# Altium PCB FIT_PM_Dual_Range_AFE.PcbDoc (part 1 of 17)
Units mm, origin at the board's own origin, x right, y up, seen from the top; angles counter-clockwise.
Board outline 259 x 114 mm, 8 copper layers (Top Layer, Mid-Layer 1, Mid-Layer 2, Layer 1, Layer 2, Mid-Layer 3, Mid-Layer 4, Bottom Layer), stack 1.616 mm thick; 963 components, 806 nets, 4757 pads, 2208 vias.
Unrouted connection lines stored in the file: 682.
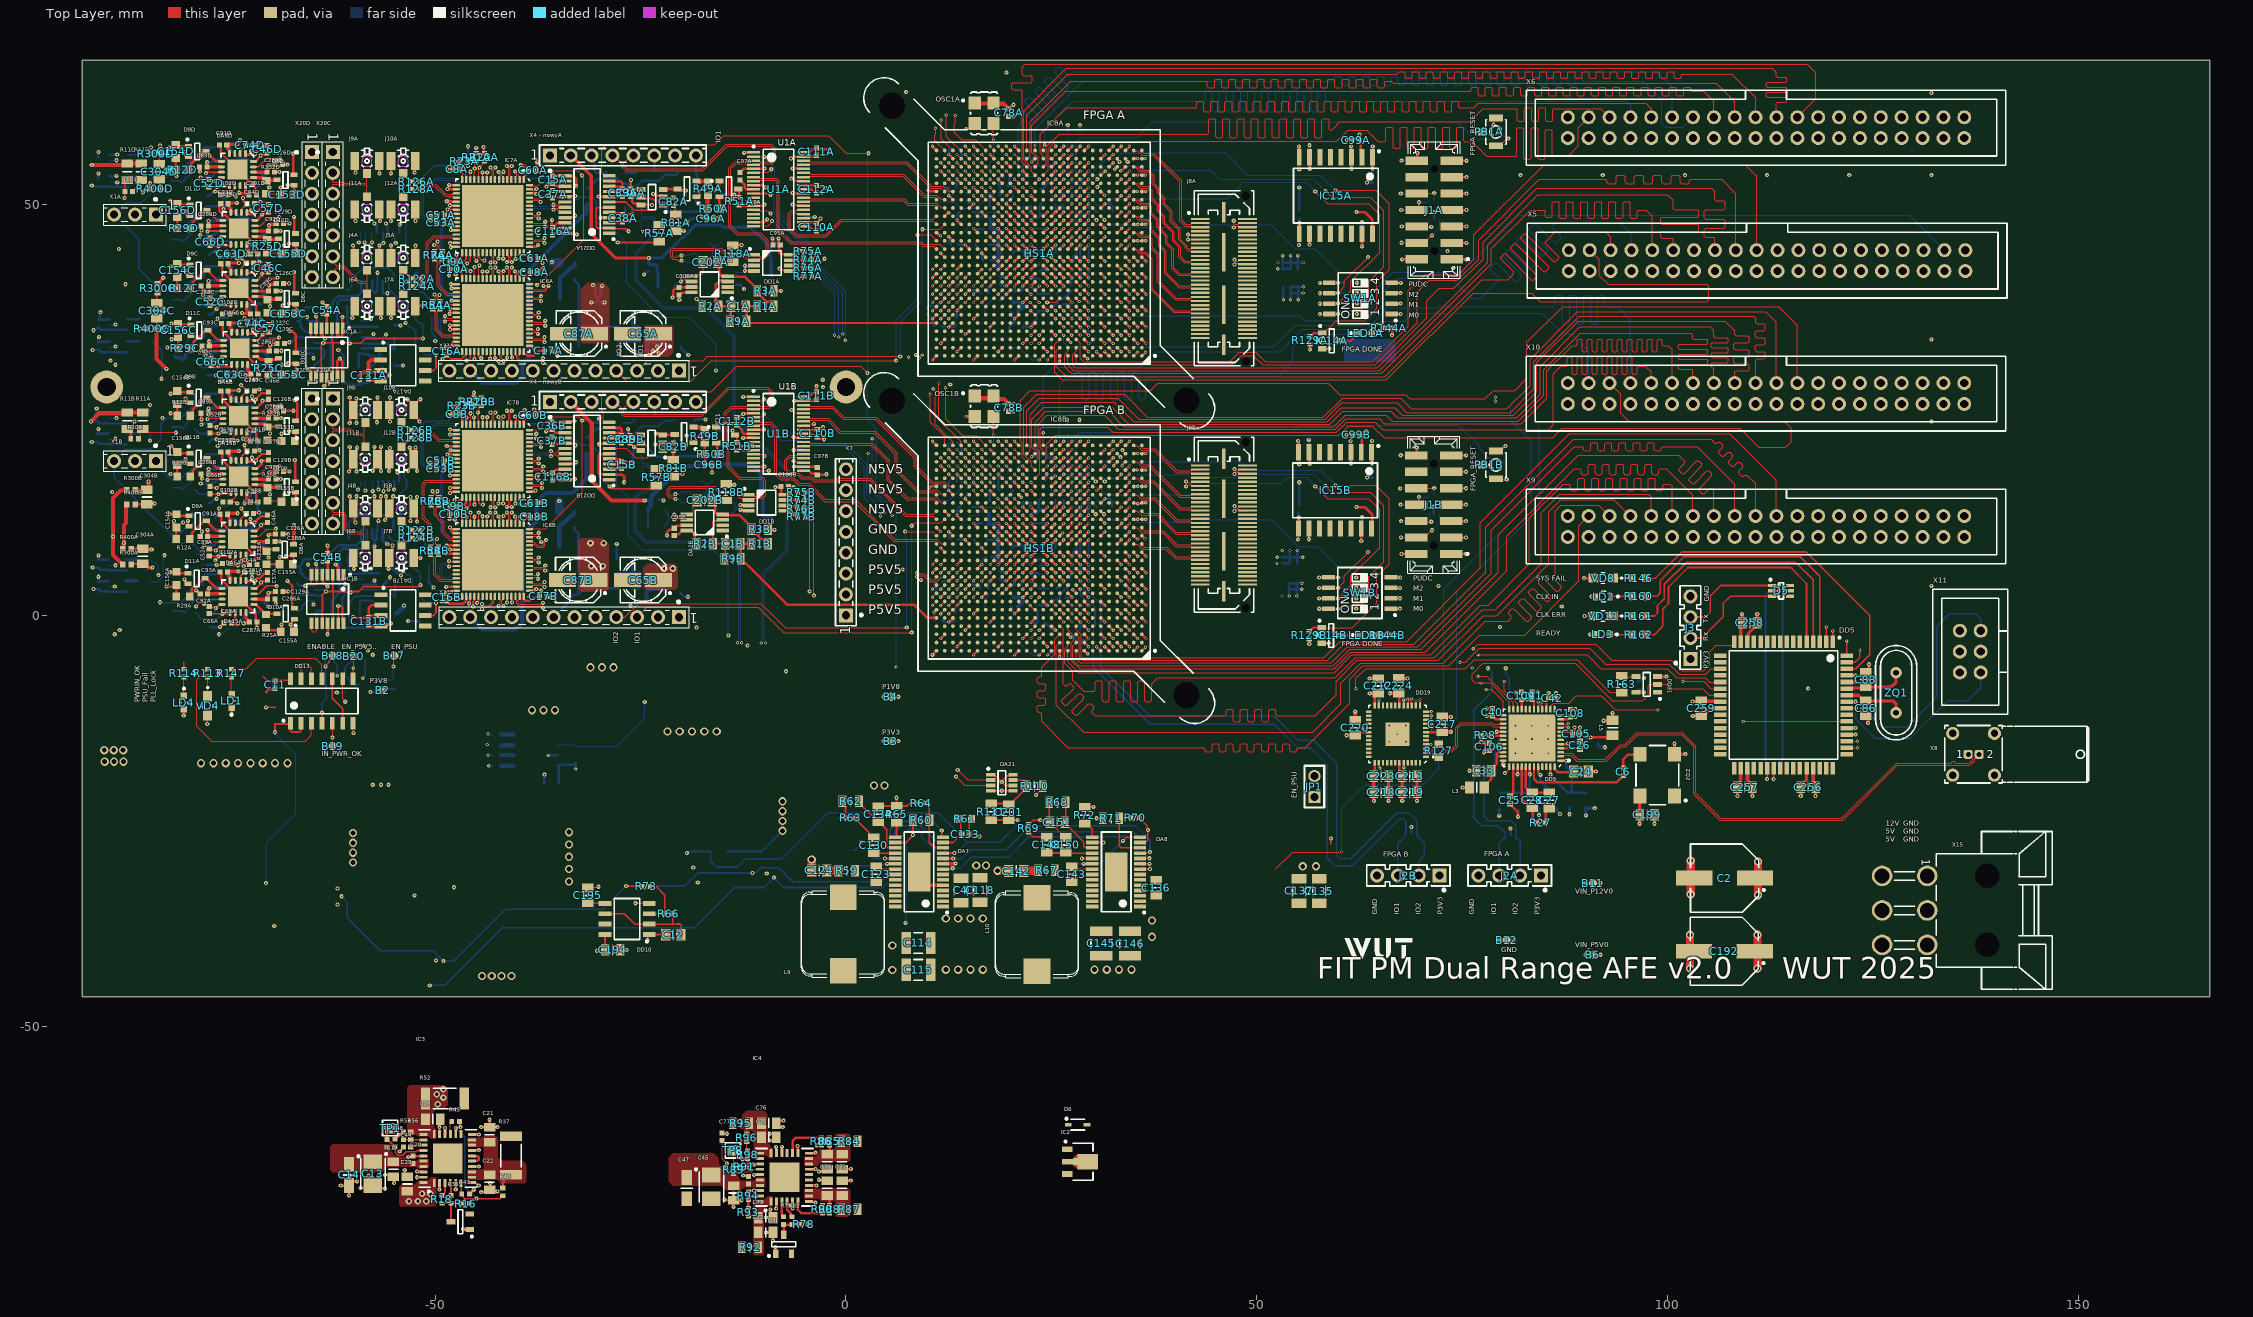
[diagram p0: Top Layer view]
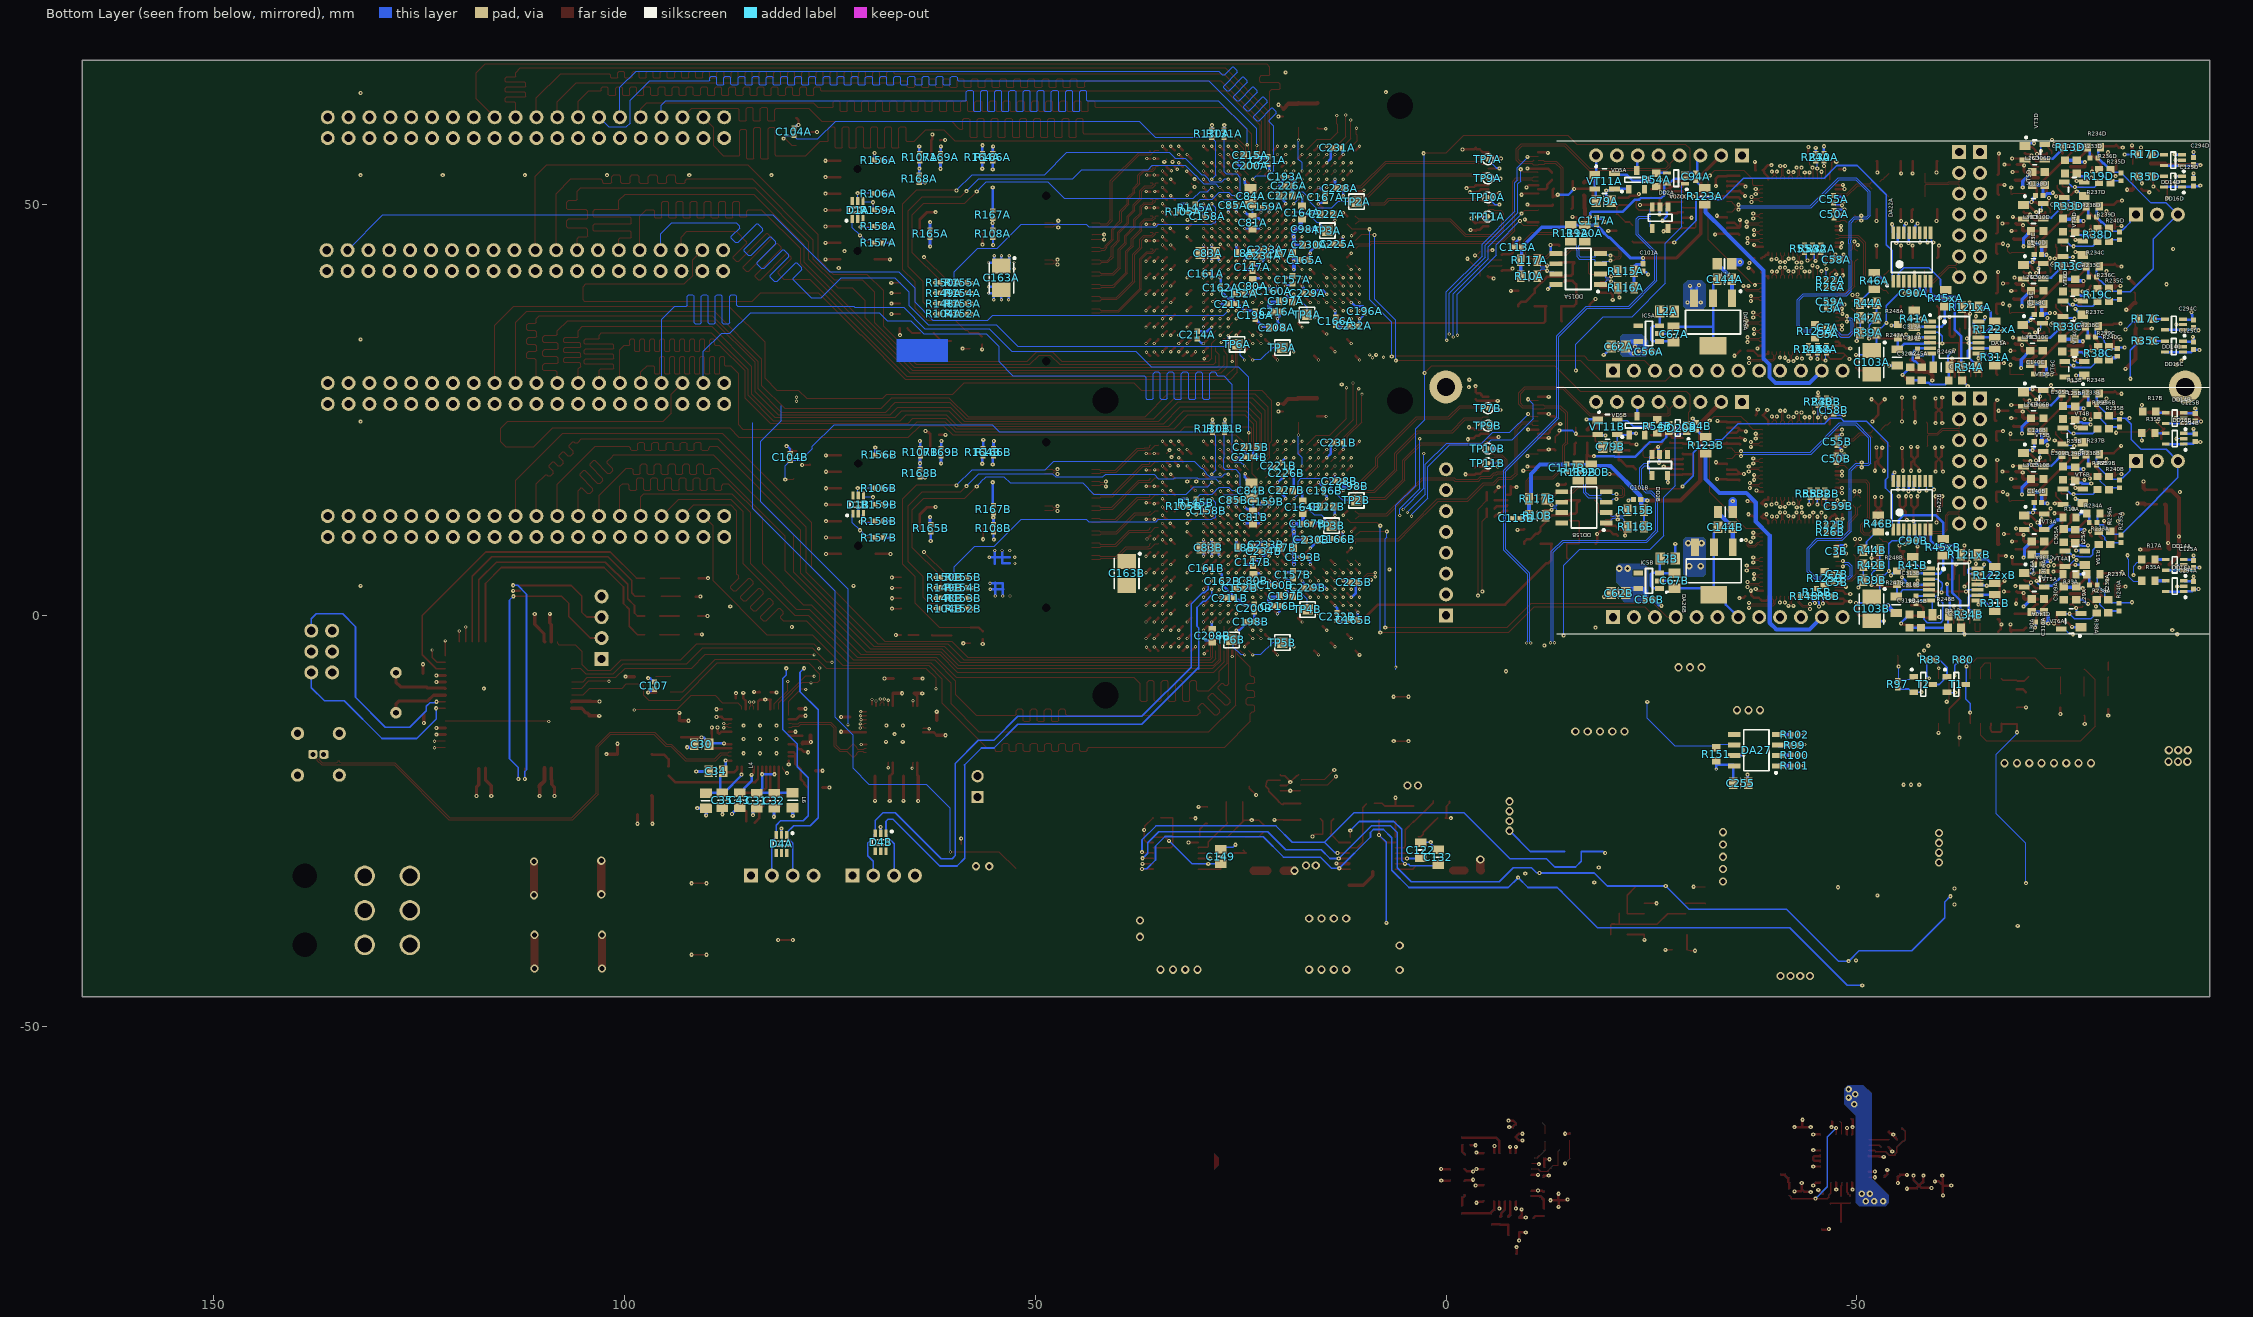
[diagram p1: Bottom Layer view, seen from below]
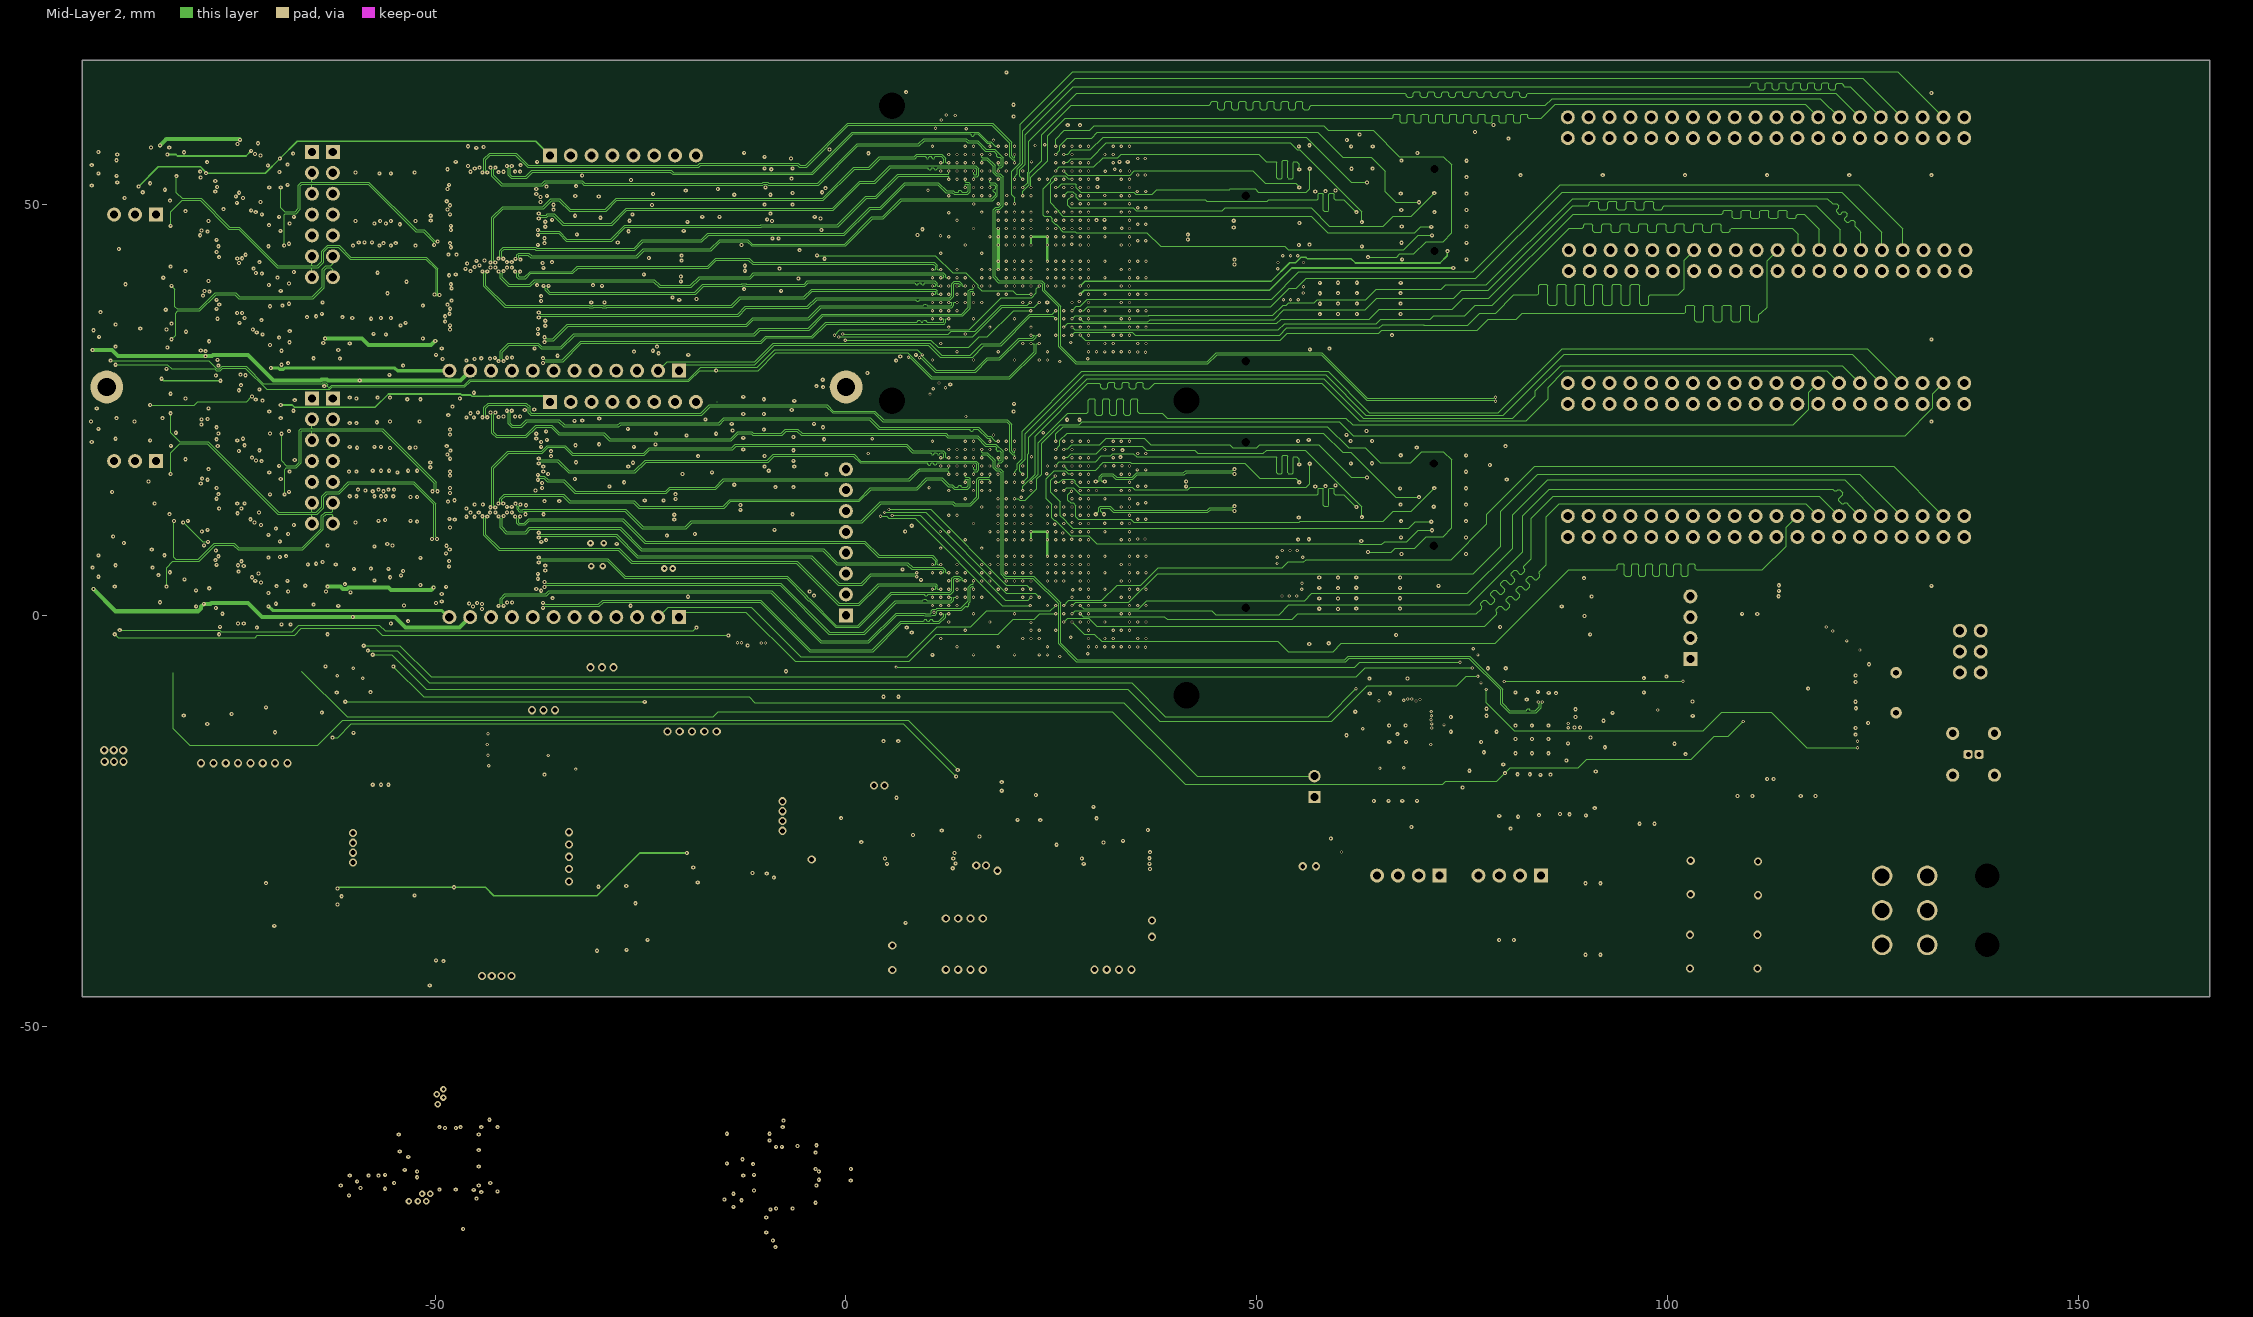
[diagram p2: Mid-Layer 2]
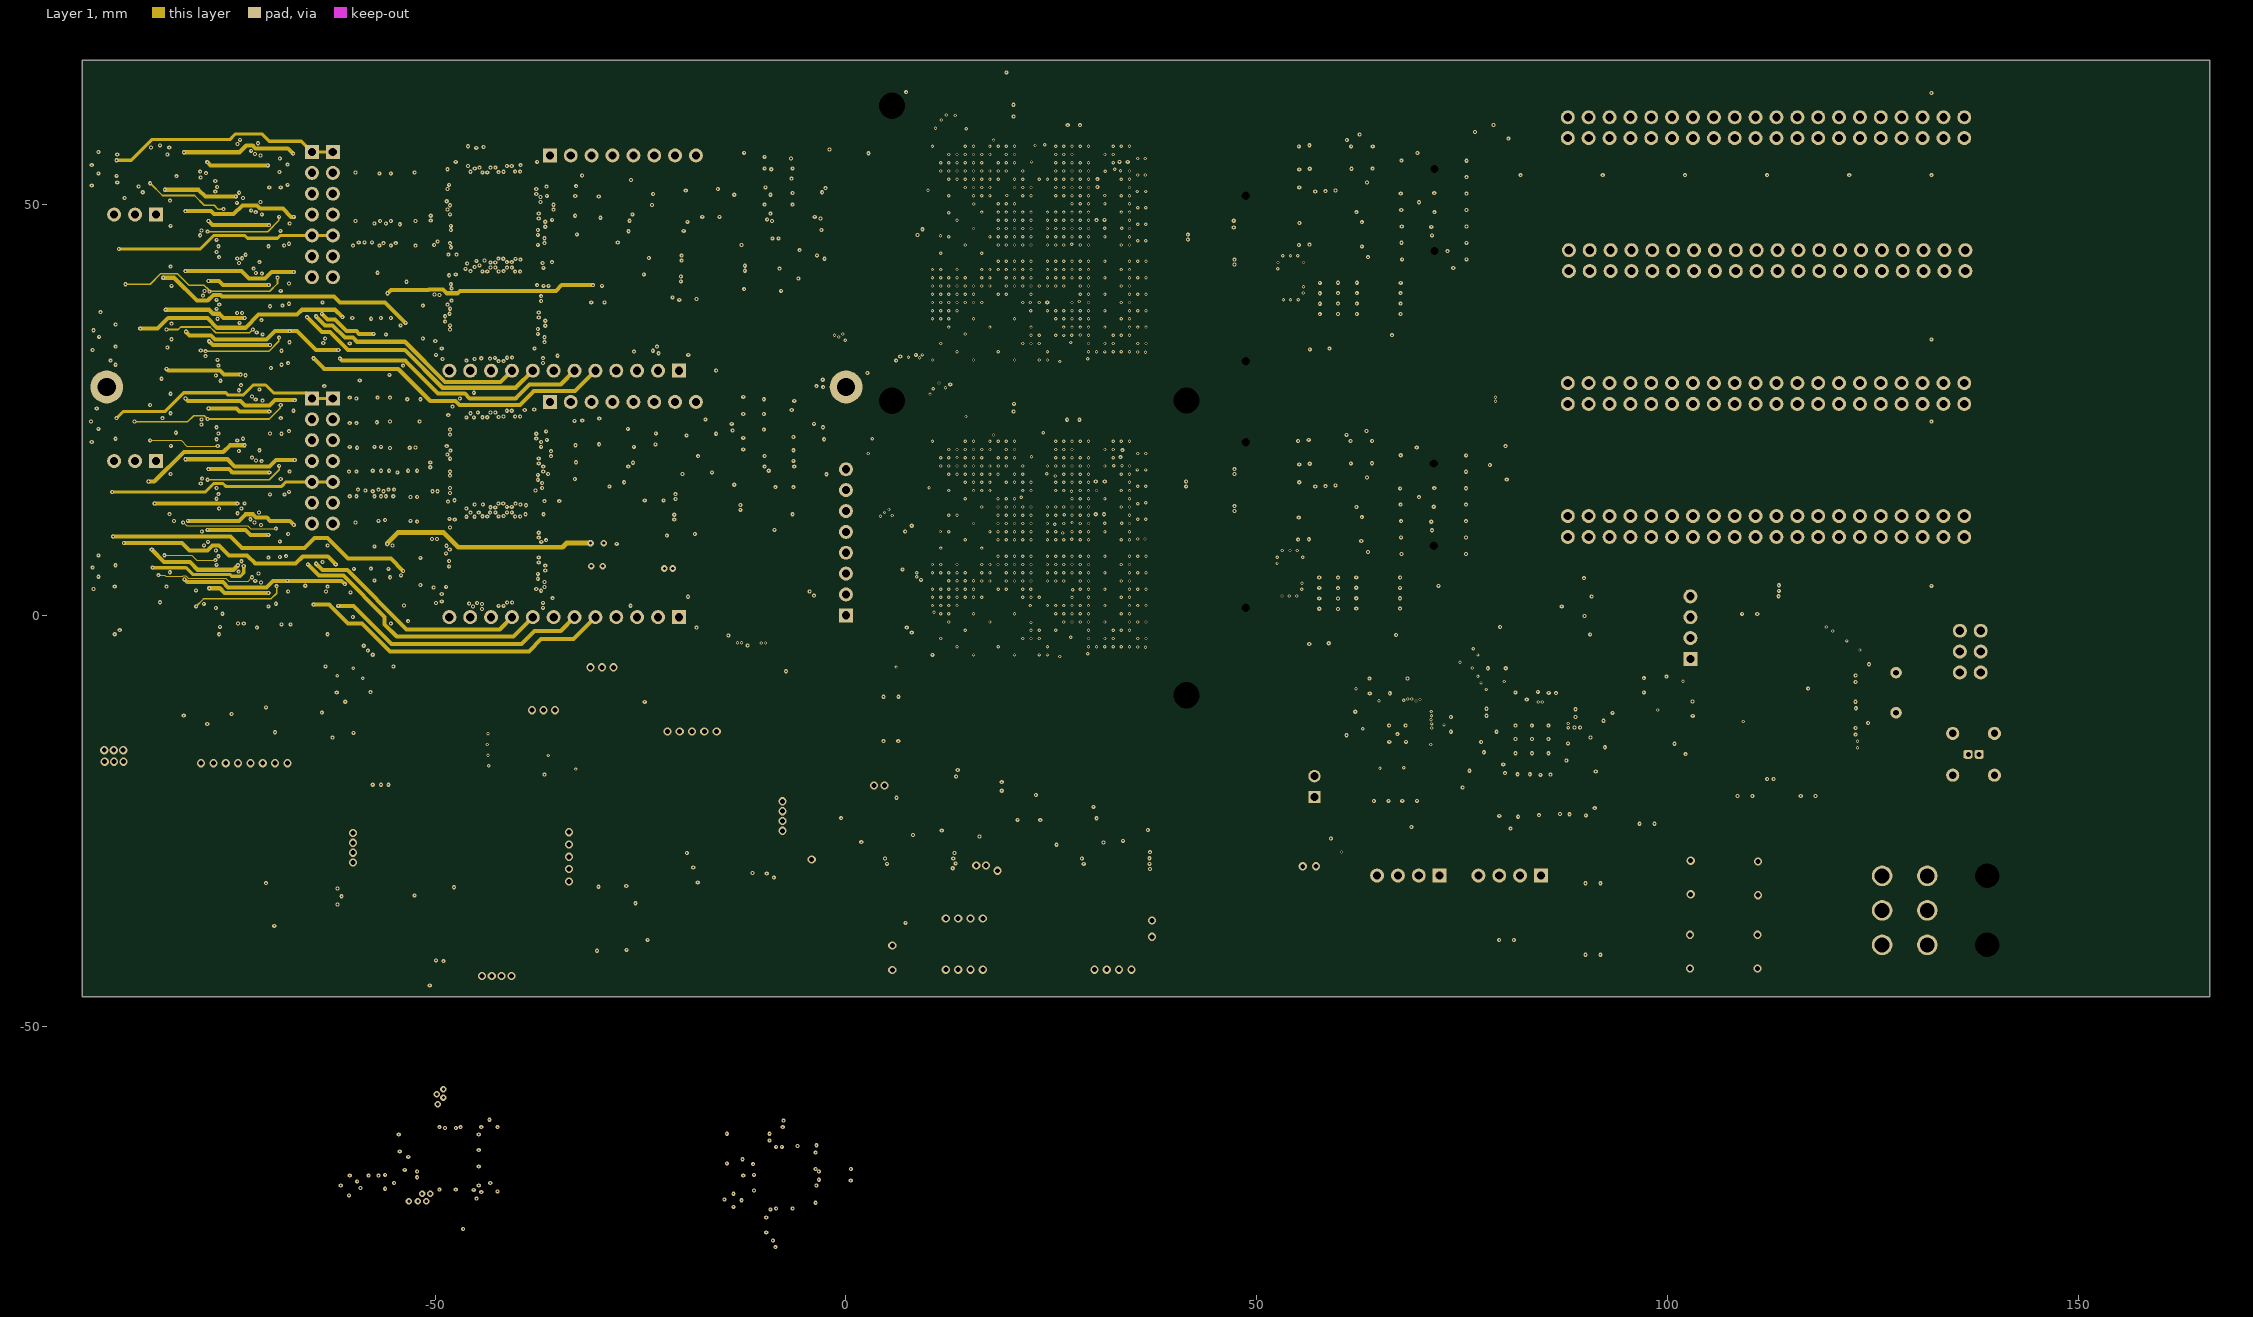
[diagram p3: Layer 1]
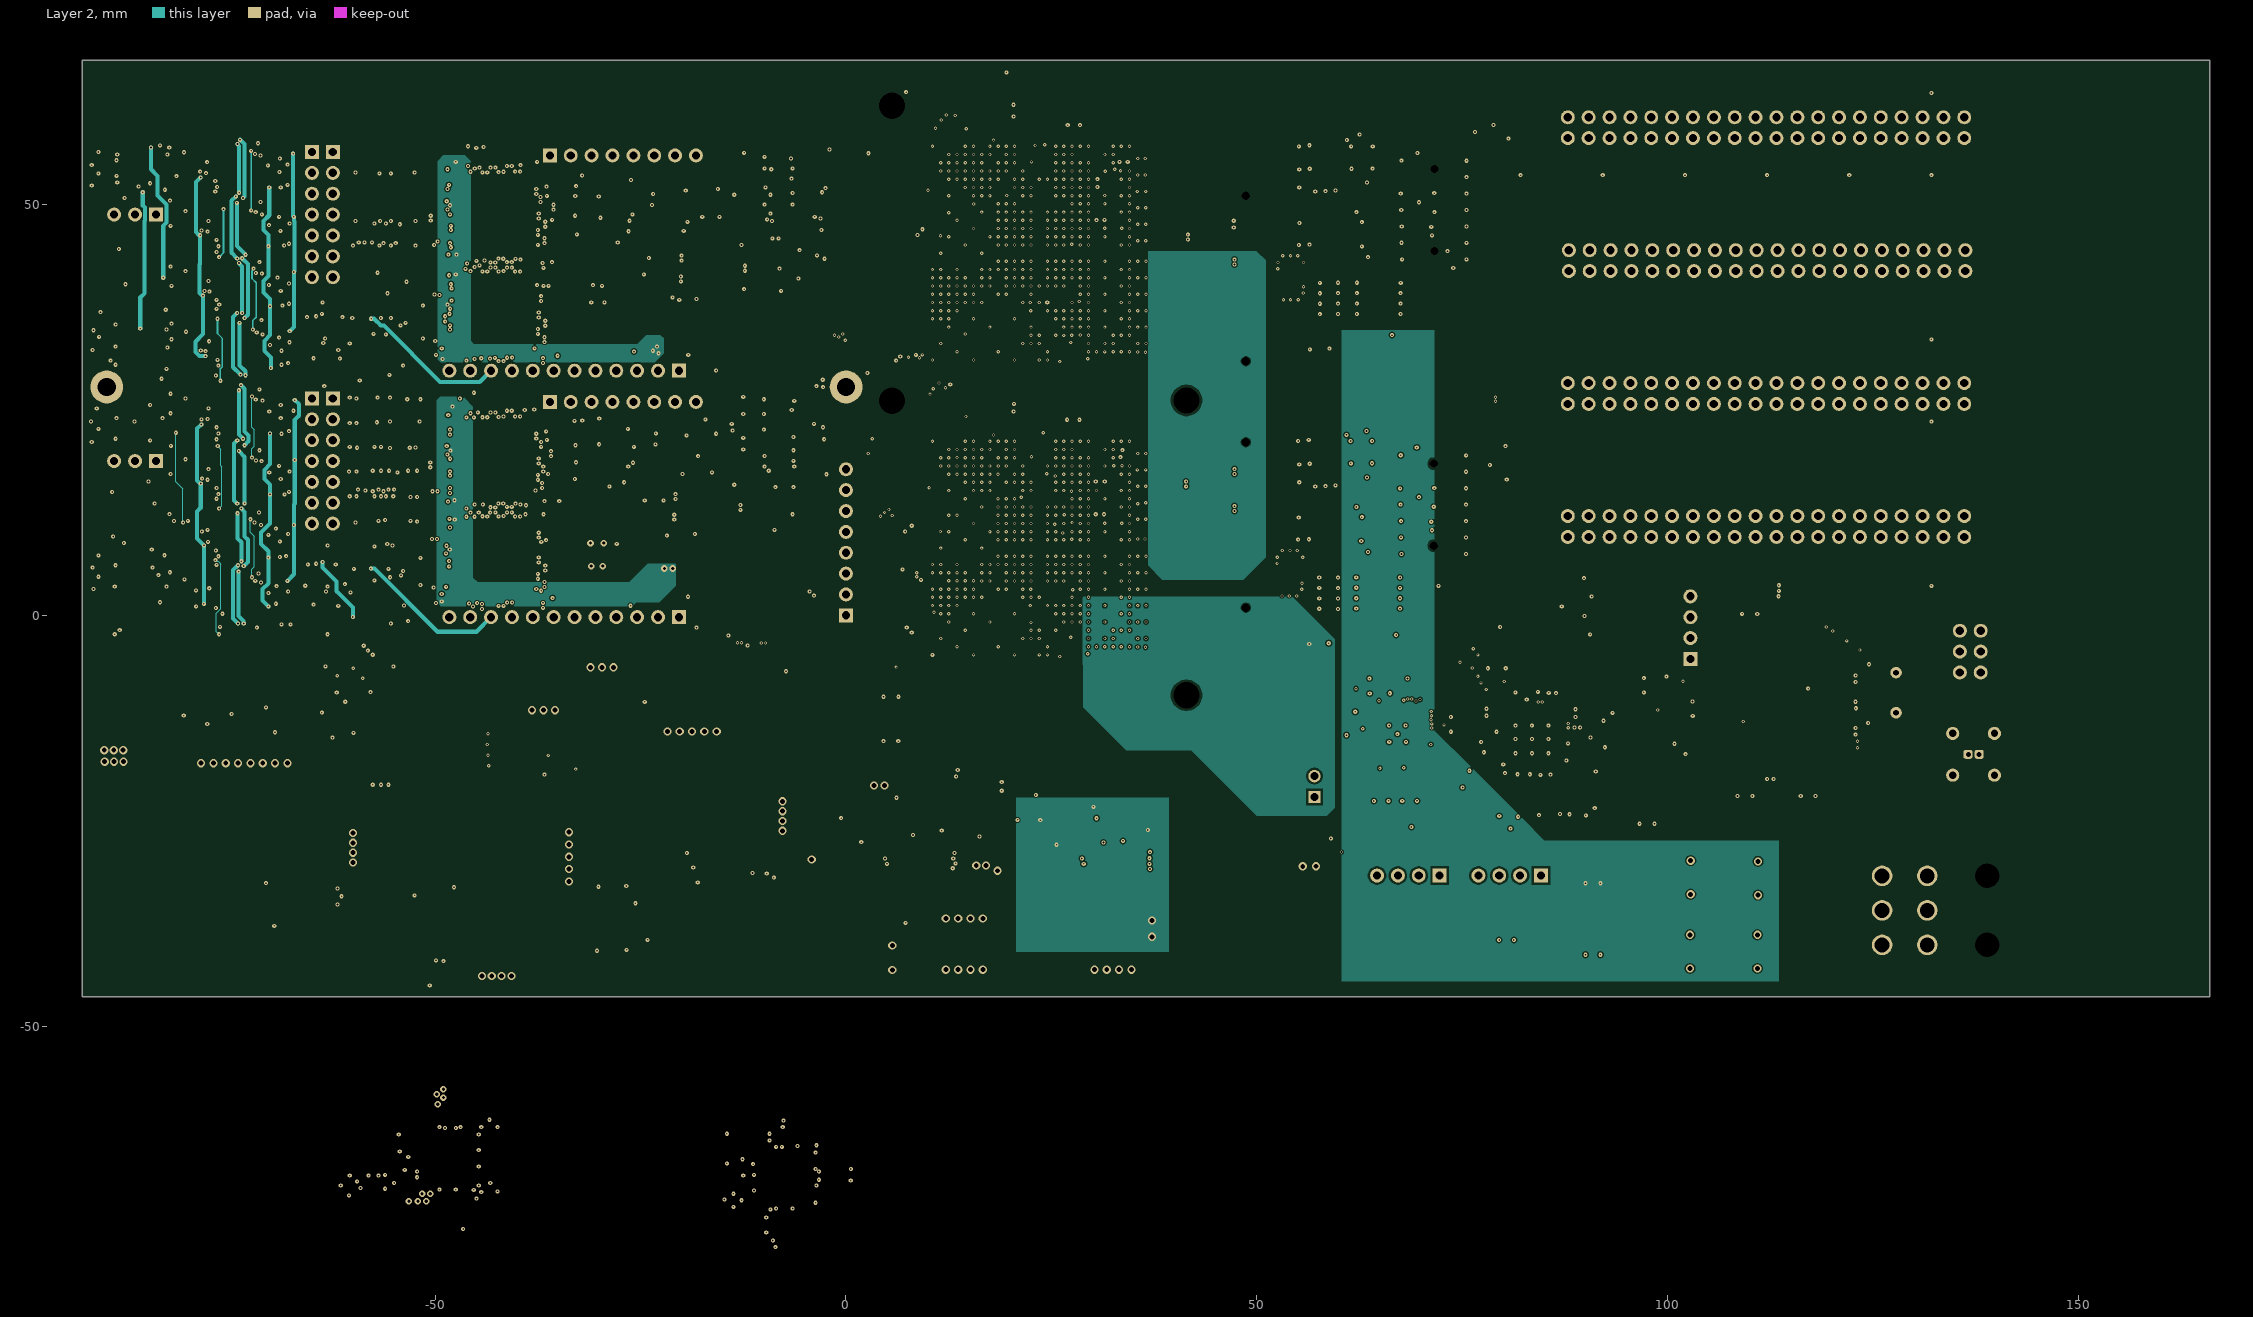
[diagram p4: Layer 2]
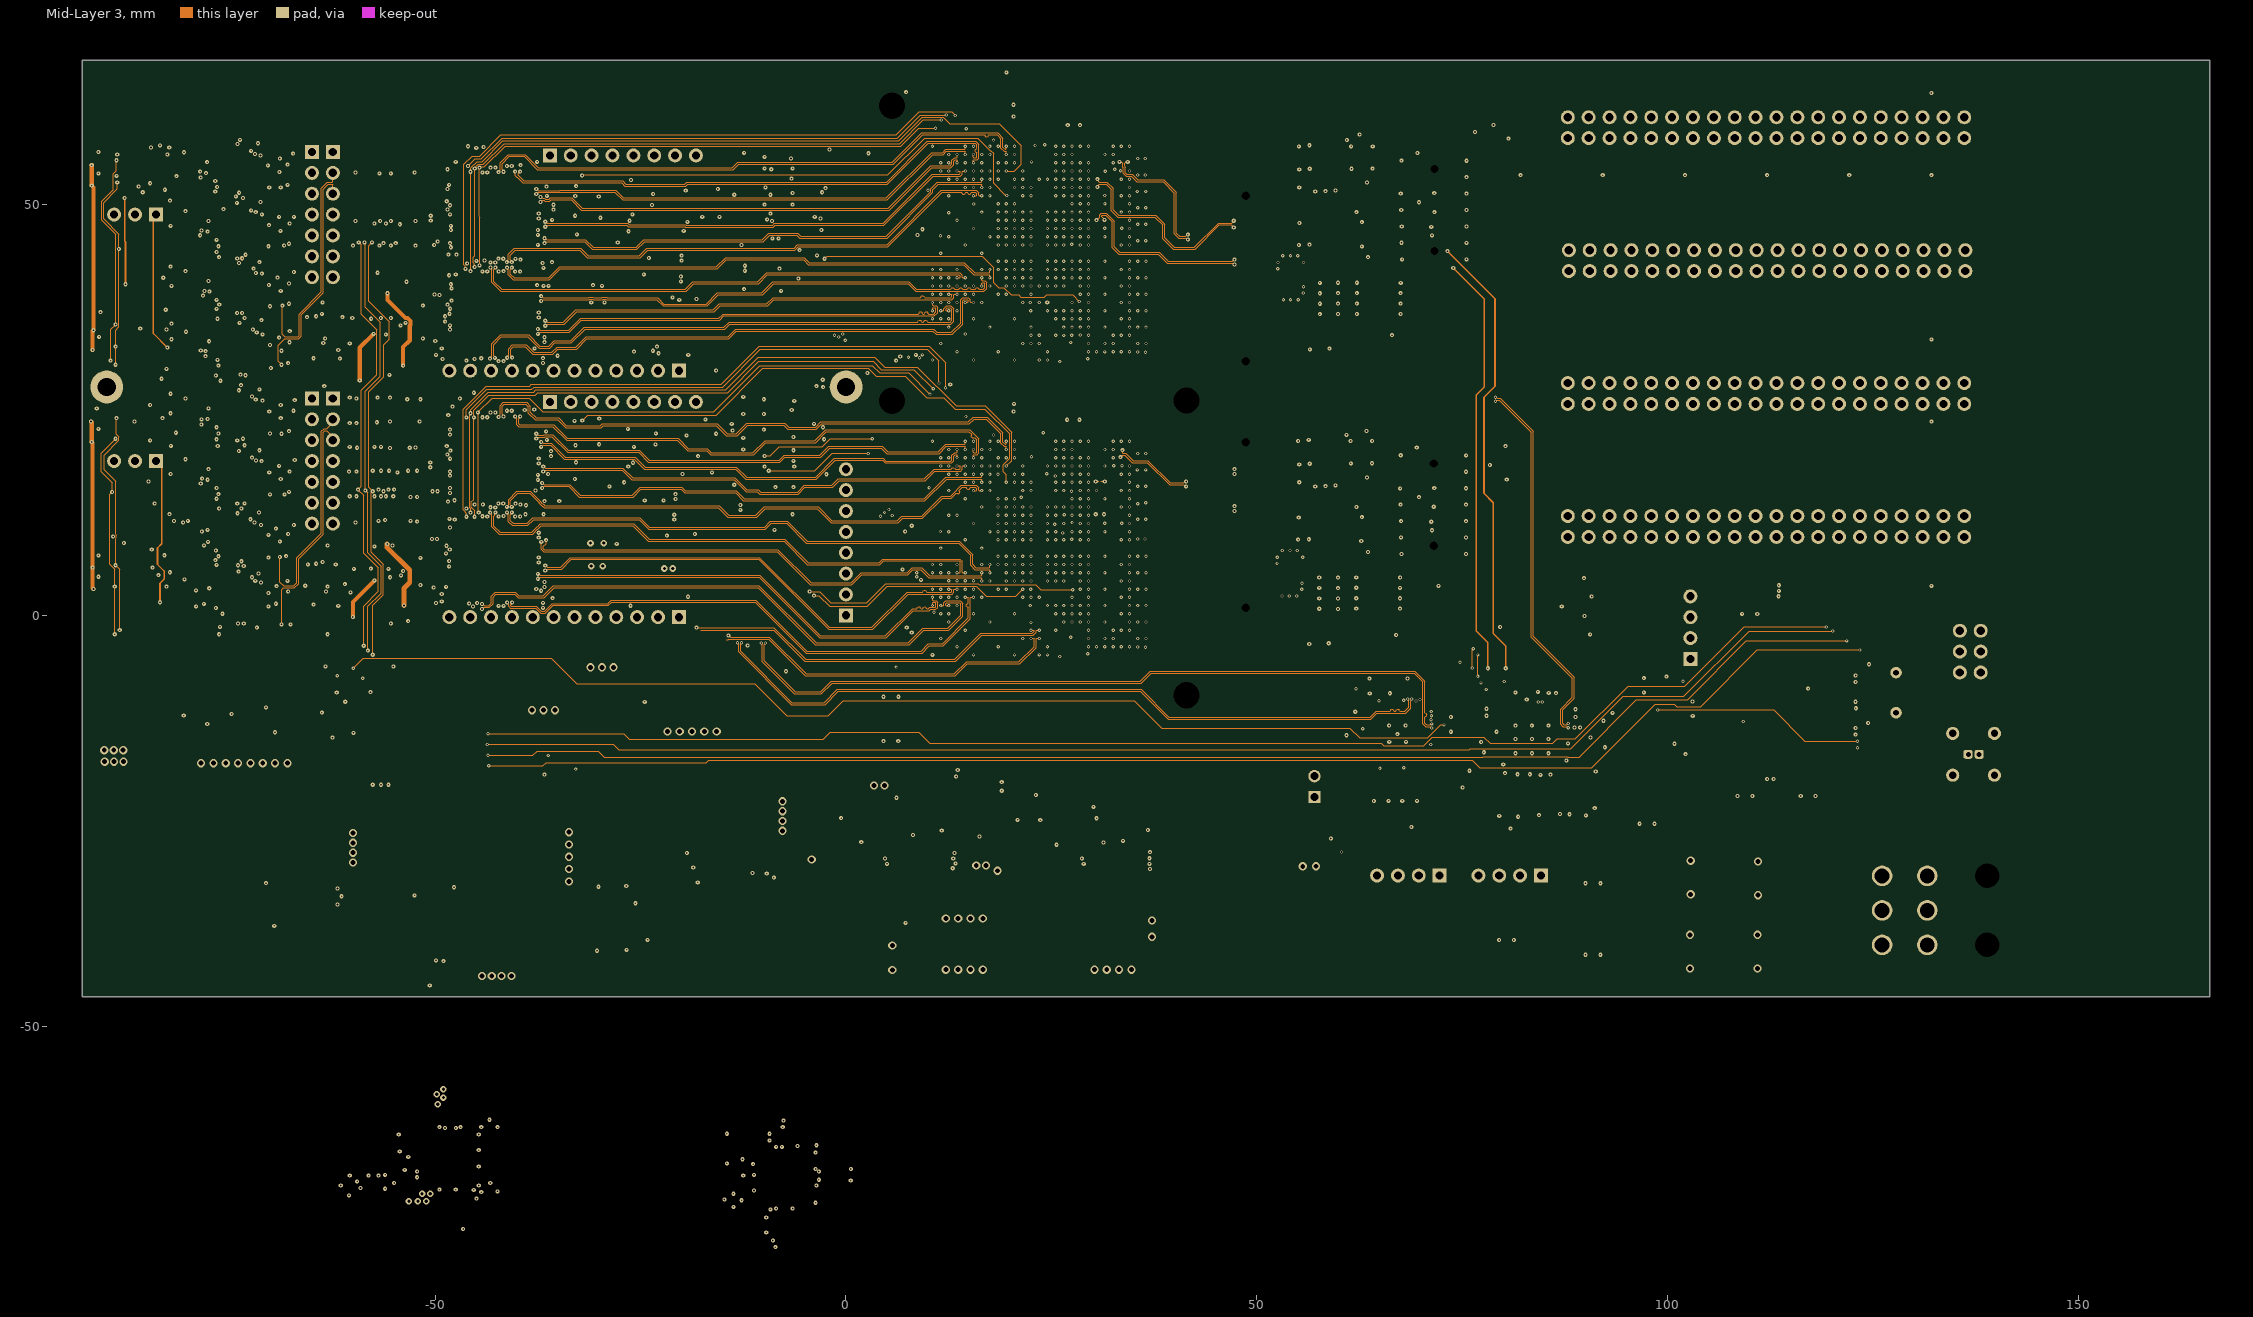
[diagram p5: Mid-Layer 3]

## Layer stack, top to bottom
Top Solder: solder mask 0.0102, Solder Resist, Dk 3.5
Top Layer: signal copper 0.0356
Dielectric 1: dielectric 0.24, FR-4, Dk 4.5
Mid-Layer 1: signal copper 0.0175
Dielectric 2: dielectric 0.16, FR-4, Dk 4.5
Mid-Layer 2: signal copper 0.0175
Dielectric 6: prepreg 0.24, PP-006, Dk 4.1
Layer 1: signal copper 0.0175
Dielectric 3: dielectric 0.16, FR-4, Dk 4.5
Layer 2: signal copper 0.0175
Dielectric 7: prepreg 0.24, PP-006, Dk 4.1
Mid-Layer 3: signal copper 0.0175
Dielectric 4: dielectric 0.16, FR-4, Dk 4.5
Mid-Layer 4: signal copper 0.0175
Dielectric 5: dielectric 0.24, FR-4, Dk 4.5
Bottom Layer: signal copper 0.0356
Bottom Solder: solder mask 0.0102, Solder Resist, Dk 3.5

## Board outline
-92.981,-46.414 -92.981,67.586 166.019,67.586 166.019,-46.414

## Design rules (kind name [scope] priority, off if disabled: settings)
AcuteAngle [All] p1: minimum=6.00000000000000E+0001 checktracksonly=FALSE
Clearance Clearance_PWR [InNamedPolygon('PWR')] p1: gap=0.3 ignorepadtopadclearanceinfootprint=FALSE
Clearance Clearance_balance [InNamedPolygon('balance') vs InNetClass('All Nets')] p2: gap=2 ignorepadtopadclearanceinfootprint=FALSE
Clearance Clearance_NPTH [InPadClass('NPTH')] p3: gap=0.3 ignorepadtopadclearanceinfootprint=FALSE
Clearance [All] p4: gap=0.1 ignorepadtopadclearanceinfootprint=FALSE except(0.15: Via-Poly; 0.254: THPad-Poly)
DiffPairsRouting [All] p1: maxlimit=0.508 minlimit=0.051 mostfreqgap=0.14 toplayer_mingap=0.1 toplayer_maxgap=0.1 toplayer_prefgap=0.1 toplayer_minwidth=0.1 toplayer_maxwidth=0.145 toplayer_prefwidth=0.145 midlayer2_mingap=0.14 midlayer2_maxgap=0.14 midlayer2_minwidth=0.1 midlayer2_maxwidth=0.1 midlayer2_prefwidth=0.1 midlayer3_mingap=0.14 midlayer3_maxgap=0.14 midlayer3_minwidth=0.1 midlayer3_maxwidth=0.1 midlayer3_prefwidth=0.1 bottomlayer_mingap=0.1 bottomlayer_maxgap=0.1 bottomlayer_prefgap=0.1 bottomlayer_minwidth=0.145 bottomlayer_maxwidth=0.145 bottomlayer_prefwidth=0.145 impedanceprofiledriven=TRUE impedanceprofileid={AFAFCC4E-AF53-4841-BFD6-B84A470D6F36} impedanceprofilevalue=100.000000 maxuncoupledlength=25
HoleSize [All] p1: absolutevalues=TRUE maxlimit=4 minlimit=0.2 maxpercent=80.000 minpercent=20.000
MatchedLengths [InAnyDifferentialPair] p1 off: tolerance=0.3 checknetsindiffpair=TRUE checkdiffpairvsdiffpair=FALSE checkxsignals=FALSE checkothers=FALSE
MatchedLengths MatchedLengths_LA_A [InNetClass('LA_A')] p2: tolerance=10 checknetsindiffpair=FALSE checkdiffpairvsdiffpair=TRUE checkxsignals=TRUE checkothers=TRUE
MatchedLengths MatchedLengths_LA_B [InNetClass('LA_B')] p3: tolerance=10 checknetsindiffpair=FALSE checkdiffpairvsdiffpair=TRUE checkxsignals=TRUE checkothers=TRUE
MatchedLengths MatchedLengths_LA_C [InNetClass('LA_C')] p4: tolerance=10 checknetsindiffpair=FALSE checkdiffpairvsdiffpair=TRUE checkxsignals=TRUE checkothers=TRUE
MatchedLengths MatchedLengths_LA_D [InNetClass('LA_D')] p5: tolerance=10 checknetsindiffpair=FALSE checkdiffpairvsdiffpair=TRUE checkxsignals=TRUE checkothers=TRUE
MinimumAnnularRing [All] p1: minimumring=0.1
MinimumSolderMaskSliver [All] p1: minsoldermaskwidth=0.05
PlaneConnect [All] p1: planeconnectstyle=Direct reliefexpansion=0.508 reliefentries=4 reliefconductorwidth=0.254 reliefairgap=0.254
PolygonConnect CAM_PolygonConnect_$Net1354 [InNet('$Net1354')] p1 off: connectstyle=Direct reliefconductorwidth=0.254 reliefentries=4 polygonreliefangle="90 Angle" airgapwidth=0.254
PolygonConnect CAM_PolygonConnect_$Net3610 [InNet('$Net3610')] p2 off: connectstyle=Direct reliefconductorwidth=0.254 reliefentries=4 polygonreliefangle="90 Angle" airgapwidth=0.254
PolygonConnect CAM_PolygonConnect_$Net2452 [InNet('$Net2452')] p3 off: connectstyle=Direct reliefconductorwidth=0.254 reliefentries=4 polygonreliefangle="90 Angle" airgapwidth=0.254
PolygonConnect CAM_PolygonConnect_$Net2531 [InNet('$Net2531')] p4 off: connectstyle=Direct reliefconductorwidth=0.254 reliefentries=4 polygonreliefangle="90 Angle" airgapwidth=0.254
PolygonConnect CAM_PolygonConnect_$Net3035 [InNet('$Net3035')] p5 off: connectstyle=Direct reliefconductorwidth=0.254 reliefentries=4 polygonreliefangle="90 Angle" airgapwidth=0.254
PolygonConnect CAM_PolygonConnect_$Net2510 [InNet('$Net2510')] p6 off: connectstyle=Direct reliefconductorwidth=0.254 reliefentries=4 polygonreliefangle="90 Angle" airgapwidth=0.254
PolygonConnect CAM_PolygonConnect_$Net2464 [InNet('$Net2464')] p7 off: connectstyle=Direct reliefconductorwidth=0.254 reliefentries=4 polygonreliefangle="90 Angle" airgapwidth=0.254
PolygonConnect CAM_PolygonConnect_$Net2462 [InNet('$Net2462')] p8 off: connectstyle=Direct reliefconductorwidth=0.254 reliefentries=4 polygonreliefangle="90 Angle" airgapwidth=0.254
PolygonConnect CAM_PolygonConnect_$Net2466 [InNet('$Net2466')] p9 off: connectstyle=Direct reliefconductorwidth=0.254 reliefentries=4 polygonreliefangle="90 Angle" airgapwidth=0.254
PolygonConnect CAM_PolygonConnect_$Net2469 [InNet('$Net2469')] p10 off: connectstyle=Direct reliefconductorwidth=0.254 reliefentries=4 polygonreliefangle="90 Angle" airgapwidth=0.254
PolygonConnect CAM_PolygonConnect_$Net2984 [InNet('$Net2984')] p11 off: connectstyle=Direct reliefconductorwidth=0.254 reliefentries=4 polygonreliefangle="90 Angle" airgapwidth=0.254
PolygonConnect CAM_PolygonConnect_$Net3036 [InNet('$Net3036')] p12 off: connectstyle=Direct reliefconductorwidth=0.254 reliefentries=4 polygonreliefangle="90 Angle" airgapwidth=0.254
PolygonConnect CAM_PolygonConnect_$Net2473 [InNet('$Net2473')] p13 off: connectstyle=Direct reliefconductorwidth=0.254 reliefentries=4 polygonreliefangle="90 Angle" airgapwidth=0.254
PolygonConnect CAM_PolygonConnect_$Net3022 [InNet('$Net3022')] p14 off: connectstyle=Direct reliefconductorwidth=0.254 reliefentries=4 polygonreliefangle="90 Angle" airgapwidth=0.254
PolygonConnect CAM_PolygonConnect_$Net66 [InNet('$Net66')] p15 off: connectstyle=Direct reliefconductorwidth=0.254 reliefentries=4 polygonreliefangle="90 Angle" airgapwidth=0.254
PolygonConnect CAM_PolygonConnect_$Net2455 [InNet('$Net2455')] p16 off: connectstyle=Direct reliefconductorwidth=0.254 reliefentries=4 polygonreliefangle="90 Angle" airgapwidth=0.254
PolygonConnect CAM_PolygonConnect_$Net3068 [InNet('$Net3068')] p17 off: connectstyle=Direct reliefconductorwidth=0.254 reliefentries=4 polygonreliefangle="90 Angle" airgapwidth=0.254
PolygonConnect CAM_PolygonConnect_$Net64 [InNet('$Net64')] p18 off: connectstyle=Direct reliefconductorwidth=0.254 reliefentries=4 polygonreliefangle="90 Angle" airgapwidth=0.254
PolygonConnect CAM_PolygonConnect_$Net2474 [InNet('$Net2474')] p19 off: connectstyle=Direct reliefconductorwidth=0.254 reliefentries=4 polygonreliefangle="90 Angle" airgapwidth=0.254
PolygonConnect CAM_PolygonConnect_$Net2461 [InNet('$Net2461')] p20 off: connectstyle=Direct reliefconductorwidth=0.254 reliefentries=4 polygonreliefangle="90 Angle" airgapwidth=0.254
PolygonConnect CAM_PolygonConnect_$Net2511 [InNet('$Net2511')] p21 off: connectstyle=Direct reliefconductorwidth=0.254 reliefentries=4 polygonreliefangle="90 Angle" airgapwidth=0.254
PolygonConnect CAM_PolygonConnect_$Net3041 [InNet('$Net3041')] p22 off: connectstyle=Direct reliefconductorwidth=0.254 reliefentries=4 polygonreliefangle="90 Angle" airgapwidth=0.254
PolygonConnect CAM_PolygonConnect_$Net3073 [InNet('$Net3073')] p23 off: connectstyle=Direct reliefconductorwidth=0.254 reliefentries=4 polygonreliefangle="90 Angle" airgapwidth=0.254
PolygonConnect CAM_PolygonConnect_$Net2500 [InNet('$Net2500')] p24 off: connectstyle=Direct reliefconductorwidth=0.254 reliefentries=4 polygonreliefangle="90 Angle" airgapwidth=0.254
PolygonConnect CAM_PolygonConnect_$Net3029 [InNet('$Net3029')] p25 off: connectstyle=Direct reliefconductorwidth=0.254 reliefentries=4 polygonreliefangle="90 Angle" airgapwidth=0.254
PolygonConnect CAM_PolygonConnect_$Net2463 [InNet('$Net2463')] p26 off: connectstyle=Direct reliefconductorwidth=0.254 reliefentries=4 polygonreliefangle="90 Angle" airgapwidth=0.254
PolygonConnect CAM_PolygonConnect_$Net2488 [InNet('$Net2488')] p27 off: connectstyle=Direct reliefconductorwidth=0.254 reliefentries=4 polygonreliefangle="90 Angle" airgapwidth=0.254
PolygonConnect CAM_PolygonConnect_$Net2468 [InNet('$Net2468')] p28 off: connectstyle=Direct reliefconductorwidth=0.254 reliefentries=4 polygonreliefangle="90 Angle" airgapwidth=0.254
PolygonConnect CAM_PolygonConnect_$Net2456 [InNet('$Net2456')] p29 off: connectstyle=Direct reliefconductorwidth=0.254 reliefentries=4 polygonreliefangle="90 Angle" airgapwidth=0.254
PolygonConnect CAM_PolygonConnect_$Net2453 [InNet('$Net2453')] p30 off: connectstyle=Direct reliefconductorwidth=0.254 reliefentries=4 polygonreliefangle="90 Angle" airgapwidth=0.254
PolygonConnect CAM_PolygonConnect_$Net2499 [InNet('$Net2499')] p31 off: connectstyle=Direct reliefconductorwidth=0.254 reliefentries=4 polygonreliefangle="90 Angle" airgapwidth=0.254
PolygonConnect CAM_PolygonConnect_$Net2478 [InNet('$Net2478')] p32 off: connectstyle=Direct reliefconductorwidth=0.254 reliefentries=4 polygonreliefangle="90 Angle" airgapwidth=0.254
PolygonConnect CAM_PolygonConnect_$Net2477 [InNet('$Net2477')] p33 off: connectstyle=Direct reliefconductorwidth=0.254 reliefentries=4 polygonreliefangle="90 Angle" airgapwidth=0.254
PolygonConnect CAM_PolygonConnect_$Net2475 [InNet('$Net2475')] p34 off: connectstyle=Direct reliefconductorwidth=0.254 reliefentries=4 polygonreliefangle="90 Angle" airgapwidth=0.254
PolygonConnect CAM_PolygonConnect_$Net2476 [InNet('$Net2476')] p35 off: connectstyle=Direct reliefconductorwidth=0.254 reliefentries=4 polygonreliefangle="90 Angle" airgapwidth=0.254
PolygonConnect CAM_PolygonConnect_$Net2755 [InNet('$Net2755')] p36 off: connectstyle=Direct reliefconductorwidth=0.254 reliefentries=4 polygonreliefangle="90 Angle" airgapwidth=0.254
PolygonConnect [All] p37: thpad.connectstyle=Relief thpad.reliefconductorwidth=0.4 thpad.reliefentries=4 thpad.polygonreliefangle="90 Angle" thpad.airgapwidth=0.254 smdpad.connectstyle=Direct smdpad.reliefconductorwidth=0.254 smdpad.reliefentries=4 smdpad.polygonreliefangle="90 Angle" smdpad.airgapwidth=0.254 via.connectstyle=Direct via.reliefconductorwidth=0.254 via.reliefentries=4 via.polygonreliefangle="90 Angle" via.airgapwidth=0.254
RoomDefinition U_FPGA_MICS_SUP2 [InComponentClass('U_FPGA_MICS_SUP2')] p1 off: confinementstyle=ConfineIn formatcopy=TRUE lockcomponents=FALSE outline 6.444,-6.914 60.944,-6.914 60.944,26.774 6.444,26.774
RoomDefinition U_FPGA_2 [InComponentClass('U_FPGA_2')] p2 off: confinementstyle=ConfineIn formatcopy=TRUE lockcomponents=FALSE outline 10.519,26.686 66.519,26.686 66.519,-6.814 10.519,-6.814
RoomDefinition U_ADCLK [InComponentClass('U_ADCLK')] p3 off: confinementstyle=ConfineIn formatcopy=TRUE lockcomponents=FALSE outline -6.481,72.086 14.019,72.086 14.019,92.086 -6.481,92.086
RoomDefinition MAIN_PLL_CDCE [InComponentClass('MAIN_PLL_CDCE')] p4 off: confinementstyle=ConfineIn formatcopy=TRUE lockcomponents=FALSE outline 22.019,93.086 43.019,93.086 43.019,127.586 22.019,127.586
RoomDefinition U_FPGA_MICS_SUP1 [InComponentClass('U_FPGA_MICS_SUP1')] p5 off: confinementstyle=ConfineIn formatcopy=TRUE lockcomponents=FALSE outline 6.519,28.949 61.019,28.949 61.019,62.637 6.519,62.637
RoomDefinition U_FPGA_1 [InComponentClass('U_FPGA_1')] p6 off: confinementstyle=ConfineIn formatcopy=TRUE lockcomponents=FALSE outline 10.519,62.586 66.519,62.586 66.519,29.086 10.519,29.086
RoomDefinition U_ADCs2 [InComponentClass('U_ADCs2')] p7 off: confinementstyle=ConfineIn formatcopy=TRUE lockcomponents=FALSE outline -68.19,-3.694 -2.377,-3.694 -2.377,30.306 -68.19,30.306
RoomDefinition U_ADCs1 [InComponentClass('U_ADCs1')] p8 off: confinementstyle=ConfineIn formatcopy=TRUE lockcomponents=FALSE outline -68.19,27.606 -2.377,27.606 -2.377,61.606 -68.19,61.606
RoutingLayers [All] p1: top layer_v5=TRUE mid layer 1_v5=FALSE mid layer 2_v5=TRUE mid layer 3_v5=TRUE mid layer 4_v5=FALSE mid layer 5_v5=TRUE mid layer 6_v5=TRUE bottom layer_v5=TRUE
RoutingVias [All] p1: holewidth=0.2 width=0.5 viastyle="Through Hole" minholewidth=0.2 minwidth=0.4 maxholewidth=5 maxwidth=5.2
SilkToSilkClearance [All] p1: silktosilkclearance=0
SilkToSolderMaskClearance [IsPad] p1: minsilkscreentomaskgap=0.05 clearancetoexposedcopper=TRUE
SolderMaskExpansion SolderMaskExpansion_via [IsVia] p1: expansion=0.102 istentingtop=TRUE
SolderMaskExpansion [All] p2: expansion=0.05 istentingtop=FALSE
SupplyNets "Schematic Supply Nets_19" [InNet('P12V0_IN')] p1: voltage=0.000
SupplyNets "Schematic Supply Nets_18" [InNet('P1V2_VCCMGTT')] p2: voltage=0.000
SupplyNets "Schematic Supply Nets_17" [InNet('P5V0_AUX')] p3: voltage=0.000
SupplyNets "Schematic Supply Nets_16" [InNet('P0V9_MGT')] p4: voltage=0.000
SupplyNets "Schematic Supply Nets_15" [InNet('VIN_P12V0')] p5: voltage=0.000
SupplyNets "Schematic Supply Nets_14" [InNet('P3V3_F_3')] p6: voltage=0.000
SupplyNets "Schematic Supply Nets_13" [InNet('P0V85')] p7: voltage=0.000
SupplyNets "Schematic Supply Nets_12" [InNet('P3V3_F_2')] p8: voltage=0.000
SupplyNets "Schematic Supply Nets_11" [InNet('P3V3_F_4')] p9: voltage=0.000
SupplyNets "Schematic Supply Nets_10" [InNet('GND')] p10: voltage=0.000
SupplyNets "Schematic Supply Nets_9" [InNet('P5V5')] p11: voltage=0.000
SupplyNets "Schematic Supply Nets_8" [InNet('P3V3_F_1')] p12: voltage=0.000
SupplyNets "Schematic Supply Nets_6" [InNet('N5V5')] p13: voltage=0.000
SupplyNets "Schematic Supply Nets_3" [InNet('VIN_P5V0')] p14: voltage=0.000
SupplyNets "Schematic Supply Nets_2" [InNet('P1V8')] p15: voltage=0.000
SupplyNets "Schematic Supply Nets_1" [InNet('P3V3')] p16: voltage=0.000
SupplyNets "Schematic Supply Nets" [InNet('P3V8')] p17: voltage=0.000
ViasUnderSMD [not (HasFootprint('QFN50P900X900X100-65N-S750') or HasFootprint('QFN50P700X700X80-49N-S290') or hasfootprint('QFN50P700X700X100-49N-S570') )] p1: allowed=FALSE
Width Width_50R [InNetClass('SE50')] p1: maxlimit=0.35 minlimit=0.15 preferedwidth=0.254 toplayer_minwidth=0.35 toplayer_prefwidth=0.35 midlayer2_maxwidth=0.15 midlayer2_prefwidth=0.15 midlayer3_maxwidth=0.15 midlayer3_prefwidth=0.15 bottomlayer_minwidth=0.35 bottomlayer_prefwidth=0.35 impedanceprofiledriven=TRUE impedanceprofileid={100DCDEA-3526-4A38-9C91-5622CAD00F50} impedanceprofilevalue=50.000000 minimp=50.000000 maximp=50.000000 favimp=50.000000
Width [All] p2: maxlimit=12.7 minlimit=0.08 preferedwidth=0.1 midlayer5_maxwidth=12 midlayer6_maxwidth=12 minimp=50.000000 maximp=50.000000 favimp=50.000000
23 further rules are at their usual default settings.

## Classes and differential pairs
channel class FPGA_MGT: U_FPGA_MGT1 U_FPGA_MGT2
component class U_FPGA_MGT2: J8B
component class U_FPGA_MGT1: J8A
net class out_RANGE_SEL[1..2]: out_RANGE_SEL1 out_RANGE_SEL2
net class In_COMP_STB[1..2]: In_COMP_STB1 In_COMP_STB2
net class AFE_I2C_SDA[1..2]: AFE_I2C_SDA1 AFE_I2C_SDA2
net class AFE_I2C_SCL[1..2]: AFE_I2C_SCL1 AFE_I2C_SCL2
component class U_Integrators1: C46A C52A C57A C63A C64A C66A C74A C89A C91A C92A C93A C102A C125A C126A C129A C138A C140A C153A C154A C155A C156A C286A C287A C288A C291A C294A C304A C305A C306A C309A C310A D8A D9A D10A D11A DA6A DA15A DD14A DD16A L25A L26A L29A L30A R11A R12A R13A R17A R19A R25A R29A R33A R35A R38A R232A R233A R234A R235A R236A R237A R238A R239A R240A R300A R400A VT3A VT4A VT5A VT6A X20A
component class U_Integrators2: C46B C52B C57B C63B C64B C66B C74B C89B C91B C92B C93B C102B C125B C126B C129B C138B C140B C153B C154B C155B C156B C286B C287B C288B C291B C294B C304B C305B C306B C309B C310B D8B D9B D10B D11B DA6B DA15B DD14B DD16B L25B L26B L29B L30B R11B R12B R13B R17B R19B R25B R29B R33B R35B R38B R232B R233B R234B R235B R236B R237B R238B R239B R240B R300B R400B VT3B VT4B VT5B VT6B X20B
net class PWR: GND NetC21_2 NetC23_2 NetC68_2 NetC70_2 NetC72_2 NetC75_2 P0V9_MGT P0V85 P1V2_VCCMGTT P1V8 P3V3 P3V8 P12V0_IN
net class LA_D: LA1_0_2 LA1_1_2 LA1_2_2 LA1_3_2 LA1_4_2 LA1_5_2 LA1_6_2 LA1_7_2 LA1_8_2 LA1_9_2 LA1_10_2 LA1_11_2 LA1_12_2 LA1_13_2 LA1_14_2 LA1_15_2 LACK1_2
net class LA_C: LA0_0_2 LA0_1_2 LA0_2_2 LA0_3_2 LA0_4_2 LA0_5_2 LA0_6_2 LA0_7_2 LA0_8_2 LA0_9_2 LA0_10_2 LA0_11_2 LA0_12_2 LA0_13_2 LA0_14_2 LA0_15_2 LACK0_2
net class LA_B: LA1_0_1 LA1_1_1 LA1_2_1 LA1_3_1 LA1_4_1 LA1_5_1 LA1_6_1 LA1_7_1 LA1_8_1 LA1_9_1 LA1_10_1 LA1_11_1 LA1_12_1 LA1_13_1 LA1_14_1 LA1_15_1 LACK1_1
net class LA_A: LA0_0_1 LA0_1_1 LA0_2_1 LA0_3_1 LA0_4_1 LA0_5_1 LA0_6_1 LA0_7_1 LA0_8_1 LA0_9_1 LA0_10_1 LA0_11_1 LA0_12_1 LA0_13_1 LA0_14_1 LA0_15_1 LACK0_1
net class S41[1..2]: S411 S412
net class S31[1..2]: S311 S312
net class S21[1..2]: S211 S212
net class S11[1..2]: S111 S112
net class Event4_P[1..2]: Event4_P1 Event4_P2
net class Event4_N[1..2]: Event4_N1 Event4_N2
net class Event3_P[1..2]: Event3_P1 Event3_P2
net class Event3_N[1..2]: Event3_N1 Event3_N2
net class Event2_P[1..2]: Event2_P1 Event2_P2
net class Event2_N[1..2]: Event2_N1 Event2_N2
net class Event1_P[1..2]: Event1_P1 Event1_P2
net class Event1_N[1..2]: Event1_N1 Event1_N2
net class Calibration_P[1..2]: Calibration_P1 Calibration_P2
net class Calibration_N[1..2]: Calibration_N1 Calibration_N2
net class INTB_G_DRV_P[1..2]: INTB_G_DRV_P1 INTB_G_DRV_P2
net class INTB_G_DRV_N[1..2]: INTB_G_DRV_N1 INTB_G_DRV_N2
net class INTA_G_DRV_P[1..2]: INTA_G_DRV_P1 INTA_G_DRV_P2
net class INTA_G_DRV_N[1..2]: INTA_G_DRV_N1 INTA_G_DRV_N2
pad class NPTH: HS1A-1 HS1B-1 J1A-15 J1A-16 J1B-15 J1B-16 X15-MECH1 X15-MECH2
channel class FPGA_MICS_SUP: U_FPGA_MICS_SUP1 U_FPGA_MICS_SUP2
channel class FPGA_: U_FPGA_1 U_FPGA_2
net class SE50: FPGA_CCLKA FPGA_CCLKB FPGA_QSPI0_CS_BA FPGA_QSPI0_CS_BB FPGA_QSPI0_IO0A FPGA_QSPI0_IO0B FPGA_QSPI0_IO1A FPGA_QSPI0_IO1B FPGA_QSPI0_IO2A FPGA_QSPI0_IO2B FPGA_QSPI0_IO3A FPGA_QSPI0_IO3B FPGA_QSPI0IO0A FPGA_QSPI0IO0B FPGA_QSPI0IO1A FPGA_QSPI0IO1B FPGA_QSPI0IO2A FPGA_QSPI0IO2B FPGA_QSPI0IO3A FPGA_QSPI0IO3B
net class PLL_CLK_P[1..2]: PLL_CLK_P1 PLL_CLK_P2
net class PLL_CLK_N[1..2]: PLL_CLK_N1 PLL_CLK_N2
net class LACK1_[1..2]: LACK1_1 LACK1_2
net class LACK0_[1..2]: LACK0_1 LACK0_2
net class LA1_15_[1..2]: LA1_15_1 LA1_15_2
net class LA1_14_[1..2]: LA1_14_1 LA1_14_2
net class LA1_13_[1..2]: LA1_13_1 LA1_13_2
net class LA1_12_[1..2]: LA1_12_1 LA1_12_2
net class LA1_11_[1..2]: LA1_11_1 LA1_11_2
net class LA1_10_[1..2]: LA1_10_1 LA1_10_2
net class LA1_9_[1..2]: LA1_9_1 LA1_9_2
net class LA1_8_[1..2]: LA1_8_1 LA1_8_2
net class LA1_7_[1..2]: LA1_7_1 LA1_7_2
net class LA1_6_[1..2]: LA1_6_1 LA1_6_2
net class LA1_5_[1..2]: LA1_5_1 LA1_5_2
net class LA1_4_[1..2]: LA1_4_1 LA1_4_2
net class LA1_3_[1..2]: LA1_3_1 LA1_3_2
net class LA1_2_[1..2]: LA1_2_1 LA1_2_2
net class LA1_1_[1..2]: LA1_1_1 LA1_1_2
net class LA1_0_[1..2]: LA1_0_1 LA1_0_2
net class LA0_15_[1..2]: LA0_15_1 LA0_15_2
net class LA0_14_[1..2]: LA0_14_1 LA0_14_2
net class LA0_13_[1..2]: LA0_13_1 LA0_13_2
net class LA0_12_[1..2]: LA0_12_1 LA0_12_2
net class LA0_11_[1..2]: LA0_11_1 LA0_11_2
net class LA0_10_[1..2]: LA0_10_1 LA0_10_2
net class LA0_9_[1..2]: LA0_9_1 LA0_9_2
net class LA0_8_[1..2]: LA0_8_1 LA0_8_2
net class LA0_7_[1..2]: LA0_7_1 LA0_7_2
net class LA0_6_[1..2]: LA0_6_1 LA0_6_2
net class LA0_5_[1..2]: LA0_5_1 LA0_5_2
net class LA0_4_[1..2]: LA0_4_1 LA0_4_2
net class LA0_3_[1..2]: LA0_3_1 LA0_3_2
net class LA0_2_[1..2]: LA0_2_1 LA0_2_2
net class LA0_1_[1..2]: LA0_1_1 LA0_1_2
net class LA0_0_[1..2]: LA0_0_1 LA0_0_2
component class U_PM12_ATxmega128: C86 C88 C255 C256 C257 C258 C259 D5 D6 DA27 DD5 J3 LD2 LD3 R99 R100 R101 R102 R146 R151 R160 R161 R162 VD8 VD13 X11 ZQ1
component class U_FPGA_MICS_SUP2: C80B C81B C83B C84B C85B C98B C99B C104B C147B C152B C157B C158B C159B C160B C161B C162B C163B C164B C165B C166B C167B C193B C196B C197B C198B C200B C208B C211B C214B C215B C216B C221B C222B C225B C226B C227B C228B C229B C230B C231B C232B C233B C234B D1B HS1B IC14B IC15B J1B L7B L8B LED1B PB1B R104B R105B R106B R107B R108B R129B R130B R131B R144B R145B R148B R149B R150B R152B R153B R154B R155B R156B R157B R158B R159B R164B R165B R166B R167B R168B R169B SW1B TP2B TP3B TP4B
component class U_FPGA_MICS_SUP1: C80A C81A C83A C84A C85A C98A C99A C104A C147A C152A C157A C158A C159A C160A C161A C162A C163A C164A C165A C166A C167A C193A C196A C197A C198A C200A C208A C211A C214A C215A C216A C221A C222A C225A C226A C227A C228A C229A C230A C231A C232A C233A C234A D1A HS1A IC14A IC15A J1A L7A L8A LED1A PB1A R104A R105A R106A R107A R108A R129A R130A R131A R144A R145A R148A R149A R150A R152A R153A R154A R155A R156A R157A R158A R159A R164A R165A R166A R167A R168A R169A SW1A TP2A TP3A TP4A
component class U_FPGA_2: C78B D4B IC8B J2B OSC1B TP5B TP6B
component class U_FPGA_1: C78A D4A IC8A J2A OSC1A TP5A TP6A
component class U_AFE: DD31 R103 R109 R163 X1A X1B
component class FIT_PM_Dual_Range_AFE: JP1 X5 X6 X9 X10
component class U_PM12_Power: B2 B3 B4 B6 B11 B12 C13 C14 C19 C20 C21 C22 C23 C29 C44 C45 C47 C48 C49 C68 C69 C70 C71 C72 C73 C75 C76 C77 D2 D3 IC3 IC4 R16 R18 R36 R37 R40 R43 R45 R47 R48 R52 R56 R58 R78 R79 R82 R84 R85 R86 R87 R88 R89 R90 R91 R92 R93 R94 R95 R96 R98 TP1 TP8
differential pair class D100: ADC_CLKA ADC_CLKB ADCA_VINA ADCA_VINB ADCA_VINC ADCA_VIND ADCAA_D01 ADCAA_D02 ADCAA_D21 ADCAA_D22 ADCAA_D41 ADCAA_D42 ADCAA_D61 ADCAA_D62 ADCAA_D81 ADCAA_D82 ADCAA_D101 ADCAA_D102 ADCAA_D121 ADCAA_D122 ADCAA_INA ADCAA_INB ADCAA_VINA ADCAA_VINB ADCAB_D01 ADCAB_D02 ADCAB_D21 ADCAB_D22 ADCAB_D41 ADCAB_D42 ADCAB_D61 ADCAB_D62 ADCAB_D81 ADCAB_D82 ADCAB_D101 ADCAB_D102 ADCAB_D121 ADCAB_D122 ADCAB_INA ADCAB_INB ADCAB_VINA ADCAB_VINB ADCB_VINA ADCB_VINC ADCBA_D01 ADCBA_D02 ADCBA_D21 ADCBA_D22 ADCBA_D41 ADCBA_D42 ADCBA_D61 ADCBA_D62 ADCBA_D81 ADCBA_D82 ADCBA_D101 ADCBA_D102 ADCBA_D121 ADCBA_D122 ADCBA_INA ADCBA_INB ADCBA_VINA ADCBA_VINB ADCBB_D01 ADCBB_D02 ADCBB_D21 ADCBB_D22 ADCBB_D41 ADCBB_D42 ADCBB_D61 ADCBB_D62 ADCBB_D81 ADCBB_D82 ADCBB_D101 ADCBB_D102 ADCBB_D121 ADCBB_D122 ADCBB_INA ADCBB_INB ADCBB_VINA ADCBB_VINB Calibration1 Calibration2 CFD_OUTA CFD_OUTB CLK0_M2C CLK1_M2C CLK2_BIDIR CLK3_BIDIR CLKA_OUT1 CLKA_OUT2 CLKB_OUT1 CLKB_OUT2 Event1 Event2 Event11 Event12 Event21 Event22 Event31 Event32 Event41 Event42 FF_DA FF_DB Gate_STR1A Gate_STR1B HA00_CC HA01_CC HA02 HA03 HA04 HA05 HA06 HA07 HA08 HA09 HA10 HA11 HA12 HA13 HA14 HA15 HA16 HA17_CC HA18 HA19 HA20 HA21 HA22 HA23 HB00_CC HB01 HB02 HB03 HB04 HB05 HB06_CC HB07 HB08 HB09 HB10 HB11 HB12 HB13 HB14 HB15 HB16 HB17_CC HB18 HB19 HB20 HB21 INAAA INAAB INABA INABB INBAA INBAB INBBA INBBB INTA_G_DRV1 INTA_G_DRV2 INTB_G_DRV1 INTB_G_DRV2 LA00_CC LA01_CC LA02 LA03 LA04 LA05 LA06 LA07 LA08 LA09 LA10 LA11 LA12 LA13 LA14 LA15 LA16 LA17_CC LA18_CC LA19 LA20 LA21 LA22 LA23 LA24 LA25 LA26 LA27 LA28 LA29 LA30 LA31 LA32 LA33 PLL_CLK1 PLL_CLK2 XINBAA XINBAB XINBBA XINBBB
net class PLL_CLK0_P[1..2]: PLL_CLK0_P1 PLL_CLK0_P2
net class PLL_CLK0_N[1..2]: PLL_CLK0_N1 PLL_CLK0_N2
net class Gate_STR1_o[1..2]: Gate_STR1_o1 Gate_STR1_o2
net class Gate_STR1_i[1..2]: Gate_STR1_i1 Gate_STR1_i2
net class CLKB_OUT_P[1..2]: CLKB_OUT_P1 CLKB_OUT_P2
net class CLKB_OUT_N[1..2]: CLKB_OUT_N1 CLKB_OUT_N2
net class CLKA_OUT_P[1..2]: CLKA_OUT_P1 CLKA_OUT_P2
net class CLKA_OUT_N[1..2]: CLKA_OUT_N1 CLKA_OUT_N2
net class CFD_OUT[1..2]: CFD_OUT1 CFD_OUT2
net class ADCBB_D12_P[1..2]: ADCBB_D12_P1 ADCBB_D12_P2
net class ADCBB_D12_N[1..2]: ADCBB_D12_N1 ADCBB_D12_N2
net class ADCBB_D10_P[1..2]: ADCBB_D10_P1 ADCBB_D10_P2
net class ADCBB_D10_N[1..2]: ADCBB_D10_N1 ADCBB_D10_N2
net class ADCBB_D8_P[1..2]: ADCBB_D8_P1 ADCBB_D8_P2
net class ADCBB_D8_N[1..2]: ADCBB_D8_N1 ADCBB_D8_N2
net class ADCBB_D6_P[1..2]: ADCBB_D6_P1 ADCBB_D6_P2
net class ADCBB_D6_N[1..2]: ADCBB_D6_N1 ADCBB_D6_N2
net class ADCBB_D4_P[1..2]: ADCBB_D4_P1 ADCBB_D4_P2
net class ADCBB_D4_N[1..2]: ADCBB_D4_N1 ADCBB_D4_N2
net class ADCBB_D2_P[1..2]: ADCBB_D2_P1 ADCBB_D2_P2
net class ADCBB_D2_N[1..2]: ADCBB_D2_N1 ADCBB_D2_N2
net class ADCBB_D0_P[1..2]: ADCBB_D0_P1 ADCBB_D0_P2
net class ADCBB_D0_N[1..2]: ADCBB_D0_N1 ADCBB_D0_N2
net class ADCBA_D12_P[1..2]: ADCBA_D12_P1 ADCBA_D12_P2
net class ADCBA_D12_N[1..2]: ADCBA_D12_N1 ADCBA_D12_N2
net class ADCBA_D10_P[1..2]: ADCBA_D10_P1 ADCBA_D10_P2
net class ADCBA_D10_N[1..2]: ADCBA_D10_N1 ADCBA_D10_N2
net class ADCBA_D8_P[1..2]: ADCBA_D8_P1 ADCBA_D8_P2
net class ADCBA_D8_N[1..2]: ADCBA_D8_N1 ADCBA_D8_N2
net class ADCBA_D6_P[1..2]: ADCBA_D6_P1 ADCBA_D6_P2
net class ADCBA_D6_N[1..2]: ADCBA_D6_N1 ADCBA_D6_N2
net class ADCBA_D4_P[1..2]: ADCBA_D4_P1 ADCBA_D4_P2
net class ADCBA_D4_N[1..2]: ADCBA_D4_N1 ADCBA_D4_N2
net class ADCBA_D2_P[1..2]: ADCBA_D2_P1 ADCBA_D2_P2
net class ADCBA_D2_N[1..2]: ADCBA_D2_N1 ADCBA_D2_N2
net class ADCBA_D0_P[1..2]: ADCBA_D0_P1 ADCBA_D0_P2
net class ADCBA_D0_N[1..2]: ADCBA_D0_N1 ADCBA_D0_N2
net class ADCAB_D12_P[1..2]: ADCAB_D12_P1 ADCAB_D12_P2
net class ADCAB_D12_N[1..2]: ADCAB_D12_N1 ADCAB_D12_N2
net class ADCAB_D10_P[1..2]: ADCAB_D10_P1 ADCAB_D10_P2
net class ADCAB_D10_N[1..2]: ADCAB_D10_N1 ADCAB_D10_N2
net class ADCAB_D8_P[1..2]: ADCAB_D8_P1 ADCAB_D8_P2
net class ADCAB_D8_N[1..2]: ADCAB_D8_N1 ADCAB_D8_N2
net class ADCAB_D6_P[1..2]: ADCAB_D6_P1 ADCAB_D6_P2
net class ADCAB_D6_N[1..2]: ADCAB_D6_N1 ADCAB_D6_N2
net class ADCAB_D4_P[1..2]: ADCAB_D4_P1 ADCAB_D4_P2
net class ADCAB_D4_N[1..2]: ADCAB_D4_N1 ADCAB_D4_N2
net class ADCAB_D2_P[1..2]: ADCAB_D2_P1 ADCAB_D2_P2
net class ADCAB_D2_N[1..2]: ADCAB_D2_N1 ADCAB_D2_N2
net class ADCAB_D0_P[1..2]: ADCAB_D0_P1 ADCAB_D0_P2
net class ADCAB_D0_N[1..2]: ADCAB_D0_N1 ADCAB_D0_N2
net class ADCAA_D12_P[1..2]: ADCAA_D12_P1 ADCAA_D12_P2
net class ADCAA_D12_N[1..2]: ADCAA_D12_N1 ADCAA_D12_N2
net class ADCAA_D10_P[1..2]: ADCAA_D10_P1 ADCAA_D10_P2
net class ADCAA_D10_N[1..2]: ADCAA_D10_N1 ADCAA_D10_N2
net class ADCAA_D8_P[1..2]: ADCAA_D8_P1 ADCAA_D8_P2
net class ADCAA_D8_N[1..2]: ADCAA_D8_N1 ADCAA_D8_N2
net class ADCAA_D6_P[1..2]: ADCAA_D6_P1 ADCAA_D6_P2
net class ADCAA_D6_N[1..2]: ADCAA_D6_N1 ADCAA_D6_N2
net class ADCAA_D4_P[1..2]: ADCAA_D4_P1 ADCAA_D4_P2
net class ADCAA_D4_N[1..2]: ADCAA_D4_N1 ADCAA_D4_N2
net class ADCAA_D2_P[1..2]: ADCAA_D2_P1 ADCAA_D2_P2
net class ADCAA_D2_N[1..2]: ADCAA_D2_N1 ADCAA_D2_N2
net class ADCAA_D0_P[1..2]: ADCAA_D0_P1 ADCAA_D0_P2
net class ADCAA_D0_N[1..2]: ADCAA_D0_N1 ADCAA_D0_N2
net class ADC_RESET[1..2]: ADC_RESET1 ADC_RESET2
net class ADC_EN2[1..2]: ADC_EN21 ADC_EN22
net class ADC_EN1[1..2]: ADC_EN11 ADC_EN12
net class ADC_DOUT[1..2]: ADC_DOUT1 ADC_DOUT2
net class ADC_DATA[1..2]: ADC_DATA1 ADC_DATA2
net class ADC_CLK[1..2]: ADC_CLK1 ADC_CLK2
channel class Gate_Strobe: Gate_Strobe1 Gate_Strobe2
component class QDC2: C54B C90B C103B C131B C313B C318B C319B C320B DA1B DA17B DA22B IC1B R31B R34B R39B R41B R42B R44B R45xB R46B R121xB R122xB R245B R246B R247B R248B X21B
component class QDC1: C54A C90A C103A C131A C313A C318A C319A C320A DA1A DA17A DA22A IC1A R31A R34A R39A R41A R42A R44A R45xA R46A R121xA R122xA R245A R246A R247A R248A X21A
channel class ADC_PLL: ADC_PLL1 ADC_PLL2
component class ADC_PLL2: C15B C36B C37B C38B C39B C79B C82B C94B C96B C116B DA24B DD2B DD20B DD21B R49B R50B R51B R54B R57B R81B R123B VD5B VT1B VT2B VT11B
component class ADC_PLL1: C15A C36A C37A C38A C39A C79A C82A C94A C96A C116A DA24A DD2A DD20A DD21A R49A R50A R51A R54A R57A R81A R123A VD5A VT1A VT2A VT11A
channel class Integrators: U_Integrators1 U_Integrators2 U_Integrators3 U_Integrators4
channel class ADCs: U_ADCs1 U_ADCs2
component class Gate_Strobe2: C1B C62B C65B C67B C87B C95B C97B C100B C101B C110B C111B C112B C113B C117B C144B C202B DA2B DA26B DD1B DD15B IC5B L1B L2B R1B R2B R3B R9B R10B R74B R75B R76B R77B R115B R116B R117B R118B R119B R120B TP7B TP9B TP10B TP11B U1B "X4 - nowyB"
component class Gate_Strobe1: C1A C62A C65A C67A C87A C95A C97A C100A C101A C110A C111A C112A C113A C117A C144A C202A DA2A DA26A DD1A DD15A IC5A L1A L2A R1A R2A R3A R9A R10A R74A R75A R76A R77A R115A R116A R117A R118A R119A R120A TP7A TP9A TP10A TP11A U1A "X4 - nowyA"
component class U_ADCs2: C3B C5B C7B C8B C9B C10B C16B C17B C18B C50B C51B C53B C55B C56B C58B C59B C60B C61B IC6B IC7B J4B J5B J6B J7B J9B J10B J11B J12B R4B R5B R6B R7B R8B R14B R15B R20B R21B R22B R23B R24B R26B R30B R32B R53B R55B R122B R124B R125B R126B R128B
component class U_ADCs1: C3A C5A C7A C8A C9A C10A C16A C17A C18A C50A C51A C53A C55A C56A C58A C59A C60A C61A IC6A IC7A J4A J5A J6A J7A J9A J10A J11A J12A R4A R5A R6A R7A R8A R14A R15A R20A R21A R22A R23A R24A R26A R30A R32A R53A R55A R122A R124A R125A R126A R128A
component class U_PM12_Supply_LED: B17 B18 B19 B20 C11 DD13 LD1 R80 R83 R97 R113 R147 T1 T2 VD4
component class U_PM12_P5V5: C4 C114 C115 C118 C122 C123 C124 C130 C132 C133 C134 DA7 L9 R59 R60 R61 R62 R63 R64 R65 X7
component class U_PM12_N5V5: C135 C136 C137 C142 C143 C145 C146 C148 C149 C150 C151 DA8 L10 R67 R68 R69 R70 R71 R72
component class U_PM12_LDO: C2 C12 C192 C194 C195 C201 DA21 DD10 IC2 LD4 R66 R73 R110 R111 R114 X15
component class MAIN_PLL_CDCE: C6 C24 C25 C26 C27 C28 C30 C31 C32 C33 C34 C35 C40 C41 C42 C43 C105 C106 C107 C108 C109 C199 DD3 L3 L4 L5 L6 R27 R28 X8 ZQ2
component class U_ADCLK: C212 C213 C217 C218 C219 C220 C223 C224 DD19 R127
channel class DAC8554: QDC1 QDC2
component class U_Integrators3: C46C C52C C57C C63C C64C C66C C74C C89C C91C C92C C93C C102C C125C C126C C129C C138C C140C C153C C154C C155C C156C C286C C287C C288C C291C C294C C304C C305C C306C C309C C310C D8C D9C D10C D11C DA6C DA15C DD14C DD16C L25C L26C L29C L30C R11C R12C R13C R17C R19C R25C R29C R33C R35C R38C R232C R233C R234C R235C R236C R237C R238C R239C R240C R300C R400C VT3C VT4C VT5C VT6C X20C
component class U_Integrators4: C46D C52D C57D C63D C64D C66D C74D C89D C91D C92D C93D C102D C125D C126D C129D C138D C140D C153D C154D C155D C156D C286D C287D C288D C291D C294D C304D C305D C306D C309D C310D D8D D9D D10D D11D DA6D DA15D DD14D DD16D L25D L26D L29D L30D R11D R12D R13D R17D R19D R25D R29D R33D R35D R38D R232D R233D R234D R235D R236D R237D R238D R239D R240D R300D R400D VT3D VT4D VT5D VT6D X20D
differential pair ADCB_VINC: +ADCB_VINC_P -ADCB_VINC_N
differential pair ADCB_VINA: +ADCB_VINA_P -ADCB_VINA_N
differential pair ADCA_VINC: +ADCA_VINC_P -ADCA_VINC_N
differential pair ADCA_VINA: +ADCA_VINA_P -ADCA_VINA_N
differential pair FF_DB: +FF_DB_P -FF_DB_N
differential pair FF_DA: +FF_DA_P -FF_DA_N
differential pair ADCAB_VINB: +ADCAB_VINB_P -ADCAB_VINB_N
differential pair ADCA_VINB: +ADCA_VINB_P -ADCA_VINB_N
differential pair ADCA_VIND: +ADCA_VIND_P -ADCA_VIND_N
differential pair XINBBB: +XINBAB_P -XINBAB_N
differential pair XINBBA: +XINBAA_P -XINBAA_N
differential pair XINBAB: +XINBBB_P -XINBBB_N
differential pair XINBAA: +XINBBA_P -XINBBA_N
differential pair ADCAB_VINA: +ADCAB_VINA_P -ADCAB_VINA_N
differential pair Q225_RX3B: +Q225_RX3B_P -Q225_RX3B_N
differential pair Q225_RX3A: +Q225_RX3A_P -Q225_RX3A_N
differential pair Q225_RX2B: +Q225_RX2B_P -Q225_RX2B_N
differential pair Q225_RX2A: +Q225_RX2A_P -Q225_RX2A_N
differential pair Q225_RX1B: +Q225_RX1B_P -Q225_RX1B_N
differential pair Q225_RX1A: +Q225_RX1A_P -Q225_RX1A_N
differential pair Q225_RX0B: +Q225_RX0B_P -Q225_RX0B_N
differential pair Q225_RX0A: +Q225_RX0A_P -Q225_RX0A_N
differential pair Q225_REFCLK0B: +Q225_REFCLK0B_P -Q225_REFCLK0B_N
differential pair Q225_REFCLK0A: +Q225_REFCLK0A_P -Q225_REFCLK0A_N
differential pair Q224_RX3B: +Q224_RX3B_P -Q224_RX3B_N
differential pair Q224_RX3A: +Q224_RX3A_P -Q224_RX3A_N
differential pair Q224_RX2B: +Q224_RX2B_P -Q224_RX2B_N
differential pair Q224_RX2A: +Q224_RX2A_P -Q224_RX2A_N
differential pair Q224_RX1B: +Q224_RX1B_P -Q224_RX1B_N
differential pair Q224_RX1A: +Q224_RX1A_P -Q224_RX1A_N
differential pair Q224_RX0B: +Q224_RX0B_P -Q224_RX0B_N
differential pair Q224_RX0A: +Q224_RX0A_P -Q224_RX0A_N
differential pair Q224_REFCLK0B: +Q224_REFCLK0B_P -Q224_REFCLK0B_N
differential pair Q224_REFCLK0A: +Q224_REFCLK0A_P -Q224_REFCLK0A_N
differential pair Event42: +Event4_P2 -Event4_N2
differential pair Event41: +Event4_P1 -Event4_N1
differential pair Event32: +Event3_P2 -Event3_N2
differential pair Event31: +Event3_P1 -Event3_N1
differential pair Event22: +Event2_P2 -Event2_N2
differential pair Event21: +Event2_P1 -Event2_N1
differential pair Event12: +Event1_P2 -Event1_N2
differential pair Event11: +Event1_P1 -Event1_N1
differential pair Calibration2: +Calibration_P2 -Calibration_N2
differential pair Calibration1: +Calibration_P1 -Calibration_N1
differential pair INTB_G_DRV2: +INTB_G_DRV_P2 -INTB_G_DRV_N2
differential pair INTB_G_DRV1: +INTB_G_DRV_P1 -INTB_G_DRV_N1
differential pair INTA_G_DRV2: +INTA_G_DRV_P2 -INTA_G_DRV_N2
differential pair INTA_G_DRV1: +INTA_G_DRV_P1 -INTA_G_DRV_N1
differential pair PLL_CLK2: +PLL_CLK_P2 -PLL_CLK_N2
differential pair PLL_CLK1: +PLL_CLK_P1 -PLL_CLK_N1
differential pair Gate_STR1B: +Gate_STR1B_P -Gate_STR1B_N
differential pair Gate_STR1A: +Gate_STR1A_P -Gate_STR1A_N
differential pair CFD_OUTB: +CFD_OUTB_P -CFD_OUTB_N
differential pair CFD_OUTA: +CFD_OUTA_P -CFD_OUTA_N
differential pair INBBB: +INBAB_P -INBAB_N
differential pair INBBA: +INBAA_P -INBAA_N
differential pair INBAB: +INBBB_P -INBBB_N
differential pair INBAA: +INBBA_P -INBBA_N
differential pair INABB: +INAAB_P -INAAB_N
differential pair INABA: +INAAA_P -INAAA_N
differential pair INAAB: +INABB_P -INABB_N
differential pair INAAA: +INABA_P -INABA_N
differential pair CLKB_OUT2: +CLKB_OUT_P2 -CLKB_OUT_N2
differential pair CLKB_OUT1: +CLKB_OUT_P1 -CLKB_OUT_N1
differential pair CLKA_OUT2: +CLKA_OUT_P2 -CLKA_OUT_N2
differential pair CLKA_OUT1: +CLKA_OUT_P1 -CLKA_OUT_N1
differential pair ADCBB_D122: +ADCBB_D12_P2 -ADCBB_D12_N2
differential pair ADCBB_D121: +ADCBB_D12_P1 -ADCBB_D12_N1
differential pair ADCBB_D102: +ADCBB_D10_P2 -ADCBB_D10_N2
differential pair ADCBB_D101: +ADCBB_D10_P1 -ADCBB_D10_N1
differential pair ADCBB_D82: +ADCBB_D8_P2 -ADCBB_D8_N2
differential pair ADCBB_D81: +ADCBB_D8_P1 -ADCBB_D8_N1
differential pair ADCBB_D62: +ADCBB_D6_P2 -ADCBB_D6_N2
differential pair ADCBB_D61: +ADCBB_D6_P1 -ADCBB_D6_N1
differential pair ADCBB_D42: +ADCBB_D4_P2 -ADCBB_D4_N2
differential pair ADCBB_D41: +ADCBB_D4_P1 -ADCBB_D4_N1
differential pair ADCBB_D22: +ADCBB_D2_P2 -ADCBB_D2_N2
differential pair ADCBB_D21: +ADCBB_D2_P1 -ADCBB_D2_N1
differential pair ADCBB_D02: +ADCBB_D0_P2 -ADCBB_D0_N2
differential pair ADCBB_D01: +ADCBB_D0_P1 -ADCBB_D0_N1
differential pair ADCBA_D122: +ADCBA_D12_P2 -ADCBA_D12_N2
differential pair ADCBA_D121: +ADCBA_D12_P1 -ADCBA_D12_N1
differential pair ADCBA_D102: +ADCBA_D10_P2 -ADCBA_D10_N2
differential pair ADCBA_D101: +ADCBA_D10_P1 -ADCBA_D10_N1
differential pair ADCBA_D82: +ADCBA_D8_P2 -ADCBA_D8_N2
differential pair ADCBA_D81: +ADCBA_D8_P1 -ADCBA_D8_N1
differential pair ADCBA_D62: +ADCBA_D6_P2 -ADCBA_D6_N2
differential pair ADCBA_D61: +ADCBA_D6_P1 -ADCBA_D6_N1
differential pair ADCBA_D42: +ADCBA_D4_P2 -ADCBA_D4_N2
differential pair ADCBA_D41: +ADCBA_D4_P1 -ADCBA_D4_N1
differential pair ADCBA_D22: +ADCBA_D2_P2 -ADCBA_D2_N2
differential pair ADCBA_D21: +ADCBA_D2_P1 -ADCBA_D2_N1
differential pair ADCBA_D02: +ADCBA_D0_P2 -ADCBA_D0_N2
differential pair ADCBA_D01: +ADCBA_D0_P1 -ADCBA_D0_N1
differential pair ADCAB_D122: +ADCAB_D12_P2 -ADCAB_D12_N2
differential pair ADCAB_D121: +ADCAB_D12_P1 -ADCAB_D12_N1
differential pair ADCAB_D102: +ADCAB_D10_P2 -ADCAB_D10_N2
differential pair ADCAB_D101: +ADCAB_D10_P1 -ADCAB_D10_N1
differential pair ADCAB_D82: +ADCAB_D8_P2 -ADCAB_D8_N2
differential pair ADCAB_D81: +ADCAB_D8_P1 -ADCAB_D8_N1
differential pair ADCAB_D62: +ADCAB_D6_P2 -ADCAB_D6_N2
differential pair ADCAB_D61: +ADCAB_D6_P1 -ADCAB_D6_N1
differential pair ADCAB_D42: +ADCAB_D4_P2 -ADCAB_D4_N2
differential pair ADCAB_D41: +ADCAB_D4_P1 -ADCAB_D4_N1
differential pair ADCAB_D22: +ADCAB_D2_P2 -ADCAB_D2_N2
differential pair ADCAB_D21: +ADCAB_D2_P1 -ADCAB_D2_N1
differential pair ADCAB_D02: +ADCAB_D0_P2 -ADCAB_D0_N2
differential pair ADCAB_D01: +ADCAB_D0_P1 -ADCAB_D0_N1
differential pair ADCAA_D122: +ADCAA_D12_P2 -ADCAA_D12_N2
differential pair ADCAA_D121: +ADCAA_D12_P1 -ADCAA_D12_N1
differential pair ADCAA_D102: +ADCAA_D10_P2 -ADCAA_D10_N2
differential pair ADCAA_D101: +ADCAA_D10_P1 -ADCAA_D10_N1
differential pair ADCAA_D82: +ADCAA_D8_P2 -ADCAA_D8_N2
differential pair ADCAA_D81: +ADCAA_D8_P1 -ADCAA_D8_N1
differential pair ADCAA_D62: +ADCAA_D6_P2 -ADCAA_D6_N2
differential pair ADCAA_D61: +ADCAA_D6_P1 -ADCAA_D6_N1
differential pair ADCAA_D42: +ADCAA_D4_P2 -ADCAA_D4_N2
differential pair ADCAA_D41: +ADCAA_D4_P1 -ADCAA_D4_N1
differential pair ADCAA_D22: +ADCAA_D2_P2 -ADCAA_D2_N2
differential pair ADCAA_D21: +ADCAA_D2_P1 -ADCAA_D2_N1
differential pair ADCAA_D02: +ADCAA_D0_P2 -ADCAA_D0_N2
differential pair ADCAA_D01: +ADCAA_D0_P1 -ADCAA_D0_N1
differential pair ADC_CLKB: +ADC_CLKB_P -ADC_CLKB_N
differential pair ADC_CLKA: +ADC_CLKA_P -ADC_CLKA_N
differential pair PLL_CLK02: +PLL_CLK0_P2 -PLL_CLK0_N2
differential pair PLL_CLK01: +PLL_CLK0_P1 -PLL_CLK0_N1
differential pair PLL_CLK0: +PLL_CLK0_P -PLL_CLK0_N
differential pair EXT_LEMO_CLK: +EXT_LEMO_CLK_P -EXT_LEMO_CLK_N

## Components (designator, comment, footprint, x,y, rotation, side; value= is the part's Value field where it differs from the comment)
B2 "SMD Pad" C100 -56.397,-9.124 r270 top
B3 "SMD Pad" C100 5.466,-15.314 r90 top
B4 "SMD Pad" C100 5.476,-9.914 r90 top
B6 "SMD Pad" C100 90.919,-41.314 r0 top
B11 "SMD Pad" C100 90.919,-32.614 r0 top
B12 "SMD Pad" C100 80.403,-39.524 r270 top
B17 "SMD Pad" C100 -54.981,-4.914 r90 top
B18 "SMD Pad" C100 -62.481,-4.914 r90 top
B19 "SMD Pad" C100 -62.481,-15.914 r90 top
B20 "SMD Pad" C100 -59.915,-4.989 r90 top
C1A "2.7pF" CAPC2012X135N -13.1,37.6 r180 top (schematic designator C1)
C1B "2.7pF" CAPC2012X135N -13.8,8.7 r180 top (schematic designator C1)
C2 "150uF" CAPAE830X1020N 106.947,-31.985 r180 top
C3A "100nF" CAPC1005X55N -46.776,37.335 r180 bottom (schematic designator C3)
C3B "100nF" CAPC1005X55N -47.5,7.8 r270 bottom (schematic designator C3)
C4 "22uF" CAPC3216X180N 13.991,-33.478 r90 top
C5A "100nF" CAPC1005X55N -46.45,34.2 r180 bottom (schematic designator C5)
C5B "100nF" CAPC1005X55N -47.543,4.057 r180 bottom (schematic designator C5)
C6 "220nF" CAPC1005X55N 94.639,-19.045 r270 top
C7A "100nF" CAPC1005X55N -46.45,35 r180 bottom (schematic designator C7)
C7B "100nF" CAPC1005X55N -47.55,5 r180 bottom (schematic designator C7)
C8A "100nF" CAPC1005X55N -47.403,54.301 r0 top (schematic designator C8)
C8B "100nF" CAPC1005X55N -47.403,24.501 r0 top (schematic designator C8)
C9A "100nF" CAPC1005X55N -47.766,43.065 r0 top (schematic designator C9)
C9B "100nF" CAPC1005X55N -47.766,13.265 r0 top (schematic designator C9)
C10A "100nF" CAPC1005X55N -47.766,42.109 r0 top (schematic designator C10)
C10B "100nF" CAPC1005X55N -47.766,12.309 r0 top (schematic designator C10)
C11 "220nF" CAPC1005X55N -69.497,-8.424 r90 top
C12 "2.2nF" CAPC2013X100N -21.031,-38.873 r0 top
C13 "33uF" CAPMP3528X210N -57.581,-67.964 r270 top
C14 "10uF" CAPMP3216X180N -60.481,-68.114 r270 top
C15A "220nF" CAPC1005X55N -35.7,53.05 r270 top (schematic designator C15)
C15B "220nF" CAPC1005X55N -27.3,18.3 r270 top (schematic designator C15)
C16A "100nF" CAPC1005X55N -48.6,32.15 r270 top (schematic designator C16)
C16B "100nF" CAPC1005X55N -48.6,2.2 r270 top (schematic designator C16)
C17A "100nF" CAPC1005X55N -36.25,32.2 r180 top (schematic designator C17)
C17B "100nF" CAPC1005X55N -36.85,2.3 r180 top (schematic designator C17)
C18A "100nF" CAPC1005X55N -37.929,41.78 r180 top (schematic designator C18)
C18B "100nF" CAPC1005X55N -37.929,11.98 r180 top (schematic designator C18)
C19 "22uF" CAPC2012X135N -55.081,-67.414 r90 top
C20 "100nF" CAPC1005X55N -52.681,-66.264 r270 top
C21 "22uF" CAPC2012X135N -43.381,-63.214 r270 top
C22 "22uF" CAPC2012X135N -43.381,-69.014 r90 top
C23 "22uF" CAPC2012X135N -50.281,-61.314 r180 top
C24 "1uF" CAPC2012X140N 89.475,-19.026 r180 top
C25 "10uF" CAPC1005X70N 80.812,-22.477 r90 top
C26 "10uF" CAPC1005X70N 89.328,-15.826 r270 top
C27 "2.2uF" CAPC2012X140N 85.604,-22.526 r270 top
C28 "220nF" CAPC2012X135N 83.515,-22.501 r270 top
C29 "22uF" CAPC2012X135N -53.381,-69.214 r270 top
C30 "220nF" CAPC2012X135N 90.607,-15.682 r180 bottom
C31 "220nF" CAPC2012X135N 83.869,-22.557 r90 bottom
C32 "220nF" CAPC2012X135N 81.776,-22.565 r90 bottom
C33 "220nF" CAPC2012X135N 77.619,-18.914 r0 top
C34 "220nF" CAPC2012X135N 88.864,-18.985 r180 bottom
C35 "220nF" CAPC2012X135N 88.079,-22.517 r90 bottom
C36A "220nF" CAPC1005X55N -26.2,51.45 r90 top (schematic designator C36)
C36B "220nF" CAPC1005X55N -35.8,23.05 r270 top (schematic designator C36)
C37A "220nF" CAPC1005X55N -35.7,51.25 r90 top (schematic designator C37)
C37B "220nF" CAPC1005X55N -35.8,21.25 r90 top (schematic designator C37)
C38A "220nF" CAPC1005X55N -27.2,48.35 r270 top (schematic designator C38)
C38B "220nF" CAPC1005X55N -27.3,21.45 r90 top (schematic designator C38)
C39A "220nF" CAPC1005X55N -27.2,51.45 r90 top (schematic designator C39)
C39B "220nF" CAPC1005X55N -26.3,21.45 r90 top (schematic designator C39)
C40 "220nF" CAPC1005X55N 78.671,-11.796 r270 top
C41 "220nF" CAPC1005X55N 83.519,-9.814 r270 top
C42 "220nF" CAPC1005X55N 85.994,-10.088 r180 top
C43 "220nF" CAPC2012X135N 85.994,-22.517 r90 bottom
C44 "1uF" CAPC1005X55N -53.431,-64.714 r0 top
C45 "33uF" CAPMP3528X210N -16.381,-69.564 r270 top
C46A "20pF" CAPC1005X55N -70.4,11.75 r270 top (schematic designator C46)
C46B "20pF" CAPC1005X55N -70.3,26.75 r270 top (schematic designator C46)
C46C "20pF" CAPC1005X55N -70.3,42.25 r270 top (schematic designator C46)
C46D "20pF" CAPC1005X55N -70.468,56.718 r270 top (schematic designator C46)
C47 "10uF" CAPMP3216X180N -19.381,-69.714 r270 top
C48 "22uF" CAPC2012X135N -13.681,-70.314 r90 top
C49 "100nF" CAPC1005X55N -11.881,-68.764 r270 top
C50A "100nF" CAPC1005X55N -47.226,48.817 r90 bottom (schematic designator C50)
C50B "100nF" CAPC1005X55N -47.5,19.05 r90 bottom (schematic designator C50)
C51A "100nF" CAPC1005X55N -49.3,48.711 r0 top (schematic designator C51)
C51B "100nF" CAPC1005X55N -49.35,18.8 r0 top (schematic designator C51)
C52A "20pF" CAPC1005X55N -77.5,7.65 r90 top (schematic designator C52)
C52B "20pF" CAPC1005X55N -77.4,22.65 r90 top (schematic designator C52)
C52C "20pF" CAPC1005X55N -77.4,38.15 r90 top (schematic designator C52)
C52D "20pF" CAPC1005X55N -77.568,52.618 r90 top (schematic designator C52)
C53A "100nF" CAPC1005X55N -49.3,47.762 r0 top (schematic designator C53)
C53B "100nF" CAPC1005X55N -49.35,17.851 r0 top (schematic designator C53)
C54A "220nF" CAPC1005X55N -63.2,37.15 r270 top (schematic designator C54)
C54B "220nF" CAPC1005X55N -63.1,7.05 r270 top (schematic designator C54)
C55A "100nF" CAPC1005X55N -47.176,50.655 r270 bottom (schematic designator C55)
C55B "100nF" CAPC1005X55N -47.6,21.15 r270 bottom (schematic designator C55)
C56A "100nF" CAPC1005X55N -24.65,32.1 r0 bottom (schematic designator C56)
C56B "100nF" CAPC1005X55N -24.75,1.9 r0 bottom (schematic designator C56)
C57A "20pF" CAPC1005X55N -70.4,4.75 r270 top (schematic designator C57)
C57B "20pF" CAPC1005X55N -70.3,19.35 r270 top (schematic designator C57)
C57C "20pF" CAPC1005X55N -70.2,34.95 r270 top (schematic designator C57)
C57D "20pF" CAPC1005X55N -70.3,49.55 r270 top (schematic designator C57)
C58A "100nF" CAPC1005X55N -47.519,43.296 r0 bottom (schematic designator C58)
C58B "100nF" CAPC1005X55N -47.2,24.95 r90 bottom (schematic designator C58)
C59A "100nF" CAPC1005X55N -46.75,38.2 r180 bottom (schematic designator C59)
C59B "100nF" CAPC1005X55N -47.766,13.265 r0 bottom (schematic designator C59)
C60A "100nF" CAPC1005X55N -38.123,54.162 r180 top (schematic designator C60)
C60B "100nF" CAPC1005X55N -38.123,24.362 r180 top (schematic designator C60)
C61A "100nF" CAPC1005X55N -37.941,43.459 r180 top (schematic designator C61)
C61B "100nF" CAPC1005X55N -37.941,13.659 r180 top (schematic designator C61)
C62A "1uF" CAPC2012X140N -21,32.7 r180 bottom (schematic designator C62)
C62B "1uF" CAPC2012X140N -21,2.7 r180 bottom (schematic designator C62)
C63A "220nF" CAPC1005X55N -75.25,-0.9 r0 top (schematic designator C63)
C63B "220nF" CAPC1005X55N -75.5,21.2 r0 top (schematic designator C63)
C63C "220nF" CAPC1005X55N -74.85,29.3 r0 top (schematic designator C63)
C63D "220nF" CAPC1005X55N -74.8,44 r0 top (schematic designator C63)
C64A "220nF" CAPC1005X55N -72.75,5.3 r180 top (schematic designator C64)
C64B "220nF" CAPC1005X55N -72.45,20 r180 top (schematic designator C64)
C64C "220nF" CAPC1005X55N -72.55,42.9 r180 top (schematic designator C64)
C64D "220nF" CAPC1005X55N -72.45,50.1 r180 top (schematic designator C64)
C65A "47uF" CAPAE530X610N -24.7,34.3 r180 top (schematic designator C65)
C65B "47uF" CAPAE530X610N -24.7,4.3 r180 top (schematic designator C65)
C66A "20pF" CAPC1005X55N -77.5,0.65 r90 top (schematic designator C66)
C66B "20pF" CAPC1005X55N -77.4,15.25 r90 top (schematic designator C66)
C66C "20pF" CAPC1005X55N -77.3,30.85 r90 top (schematic designator C66)
C66D "20pF" CAPC1005X55N -77.4,45.45 r90 top (schematic designator C66)
C67A "1uF" CAPC2012X140N -27.7,34.2 r270 bottom (schematic designator C67)
C67B "1uF" CAPC2012X140N -27.8,4.2 r90 bottom (schematic designator C67)
C68 "22uF" CAPC2012X135N -2.281,-66.514 r90 top
C69 "22uF" CAPC2012X135N -0.481,-66.514 r90 top
C70 "22uF" CAPC2012X135N -2.281,-69.714 r270 top
C71 "22uF" CAPC2012X135N -0.481,-69.714 r270 top
C72 "22uF" CAPC2012X135N -9.781,-75.114 r180 top
C73 "22uF" CAPC2012X135N -9.781,-73.314 r180 top
C74A "220nF" CAPC1005X55N -72.55,12.4 r180 top (schematic designator C74)
C74B "220nF" CAPC1005X55N -72.45,27.3 r180 top (schematic designator C74)
C74C "220nF" CAPC1005X55N -72.35,35.5 r180 top (schematic designator C74)
C74D "220nF" CAPC1005X55N -72.6,57.2 r180 top (schematic designator C74)
C75 "22uF" CAPC2012X135N -9.381,-63.514 r180 top
C76 "22uF" CAPC2012X135N -9.381,-61.814 r180 top
C77 "1uF" CAPC1005X55N -15.081,-63.464 r270 top
C78A "100nF" CAPC1005X55N 19.802,61.195 r90 top (schematic designator C78)
C78B "100nF" CAPC1005X55N 19.802,25.295 r90 top (schematic designator C78)
C79A "47pF" CAPC2012X140N -19.2,50.4 r180 bottom (schematic designator C79)
C79B "47pF" CAPC2012X140N -20,20.5 r180 bottom (schematic designator C79)
C80A "47uF" CAPC1608X100N 23.519,40.086 r90 bottom (schematic designator C80)
C80B "47uF" CAPC1608X100N 23.444,4.222 r90 bottom (schematic designator C80)
C81A "47uF" CAPC1608X100N 23.554,47.783 r90 bottom (schematic designator C81)
C81B "47uF" CAPC1608X100N 23.479,11.919 r90 bottom (schematic designator C81)
C82A "220nF" CAPC1005X55N -21,50.35 r270 top (schematic designator C82)
C82B "220nF" CAPC1005X55N -21,20.55 r270 top (schematic designator C82)
C83A "100uF" CAPC2013X145N 28.989,44.086 r180 bottom (schematic designator C83)
C83B "100uF" CAPC2013X145N 28.914,8.222 r180 bottom (schematic designator C83)
C84A "100uF" CAPC2013X145N 23.796,51.01 r270 bottom (schematic designator C84)
C84B "100uF" CAPC2013X145N 23.694,15.181 r270 bottom (schematic designator C84)
C85A "10uF" CAPC1005X70N 25.95,49.895 r0 bottom (schematic designator C85)
C85B "10uF" CAPC1005X70N 25.875,14.032 r0 bottom (schematic designator C85)
C86 "20pF" CAPC2012X135N 124.119,-11.314 r90 top
C87A "47uF" CAPAE530X610N -32.5,34.3 r180 top (schematic designator C87)
C87B "47uF" CAPAE530X610N -32.6,4.3 r180 top (schematic designator C87)
C88 "20pF" CAPC2012X135N 124.119,-7.814 r270 top
C89A "10nF" CAPC1005X55N -78.15,9.6 r0 top (schematic designator C89)
C89B "10nF" CAPC1005X55N -78.05,24.6 r0 top (schematic designator C89)
C89C "10nF" CAPC1005X55N -69.85,39.5 r180 top (schematic designator C89)
C89D "10nF" CAPC1005X55N -78.218,54.568 r0 top (schematic designator C89)
C90A "220nF" CAPC1005X55N -56.85,39.2 r0 bottom (schematic designator C90)
C90B "220nF" CAPC1005X55N -56.85,9.1 r0 bottom (schematic designator C90)
C91A "10nF" CAPC1005X55N -75.75,12.3 r0 top (schematic designator C91)
C91B "10nF" CAPC1005X55N -75.65,27.3 r0 top (schematic designator C91)
C91C "10nF" CAPC1005X55N -75.65,42.8 r0 top (schematic designator C91)
C91D "10nF" CAPC1005X55N -75.818,57.268 r0 top (schematic designator C91)
C92A "10nF" CAPC1005X55N -78.15,2.6 r0 top (schematic designator C92)
C92B "10nF" CAPC1005X55N -69.85,16.6 r180 top (schematic designator C92)
C92C "10nF" CAPC1005X55N -77.95,32.8 r0 top (schematic designator C92)
C92D "10nF" CAPC1005X55N -69.85,46.8 r180 top (schematic designator C92)
C93A "10nF" CAPC1005X55N -75.75,5.3 r0 top (schematic designator C93)
C93B "10nF" CAPC1005X55N -72.05,13.8 r180 top (schematic designator C93)
C93C "10nF" CAPC1005X55N -75.55,35.5 r0 top (schematic designator C93)
C93D "10nF" CAPC1005X55N -75.65,50.1 r0 top (schematic designator C93)
C94A "220nF" CAPC1005X55N -30.4,53.4 r270 bottom (schematic designator C94)
C94B "220nF" CAPC1005X55N -30.5,23 r270 bottom (schematic designator C94)
C95A "220nF" CAPC1005X55N -8.45,45.1 r0 top (schematic designator C95)
C95B "220nF" CAPC1005X55N -20.9,10.15 r90 top (schematic designator C95)